# Altium PCB UI_BOARD.PcbDoc
Units mm, origin at the board's own origin, x right, y up, seen from the top; angles counter-clockwise.
Board outline 149.86 x 79.88 mm, 4 copper layers (SIG, GND_1, GND_2, PWR), stack 0.603 mm thick; 205 components, 146 nets, 820 pads, 0 vias.
Unrouted connection lines stored in the file: 595.
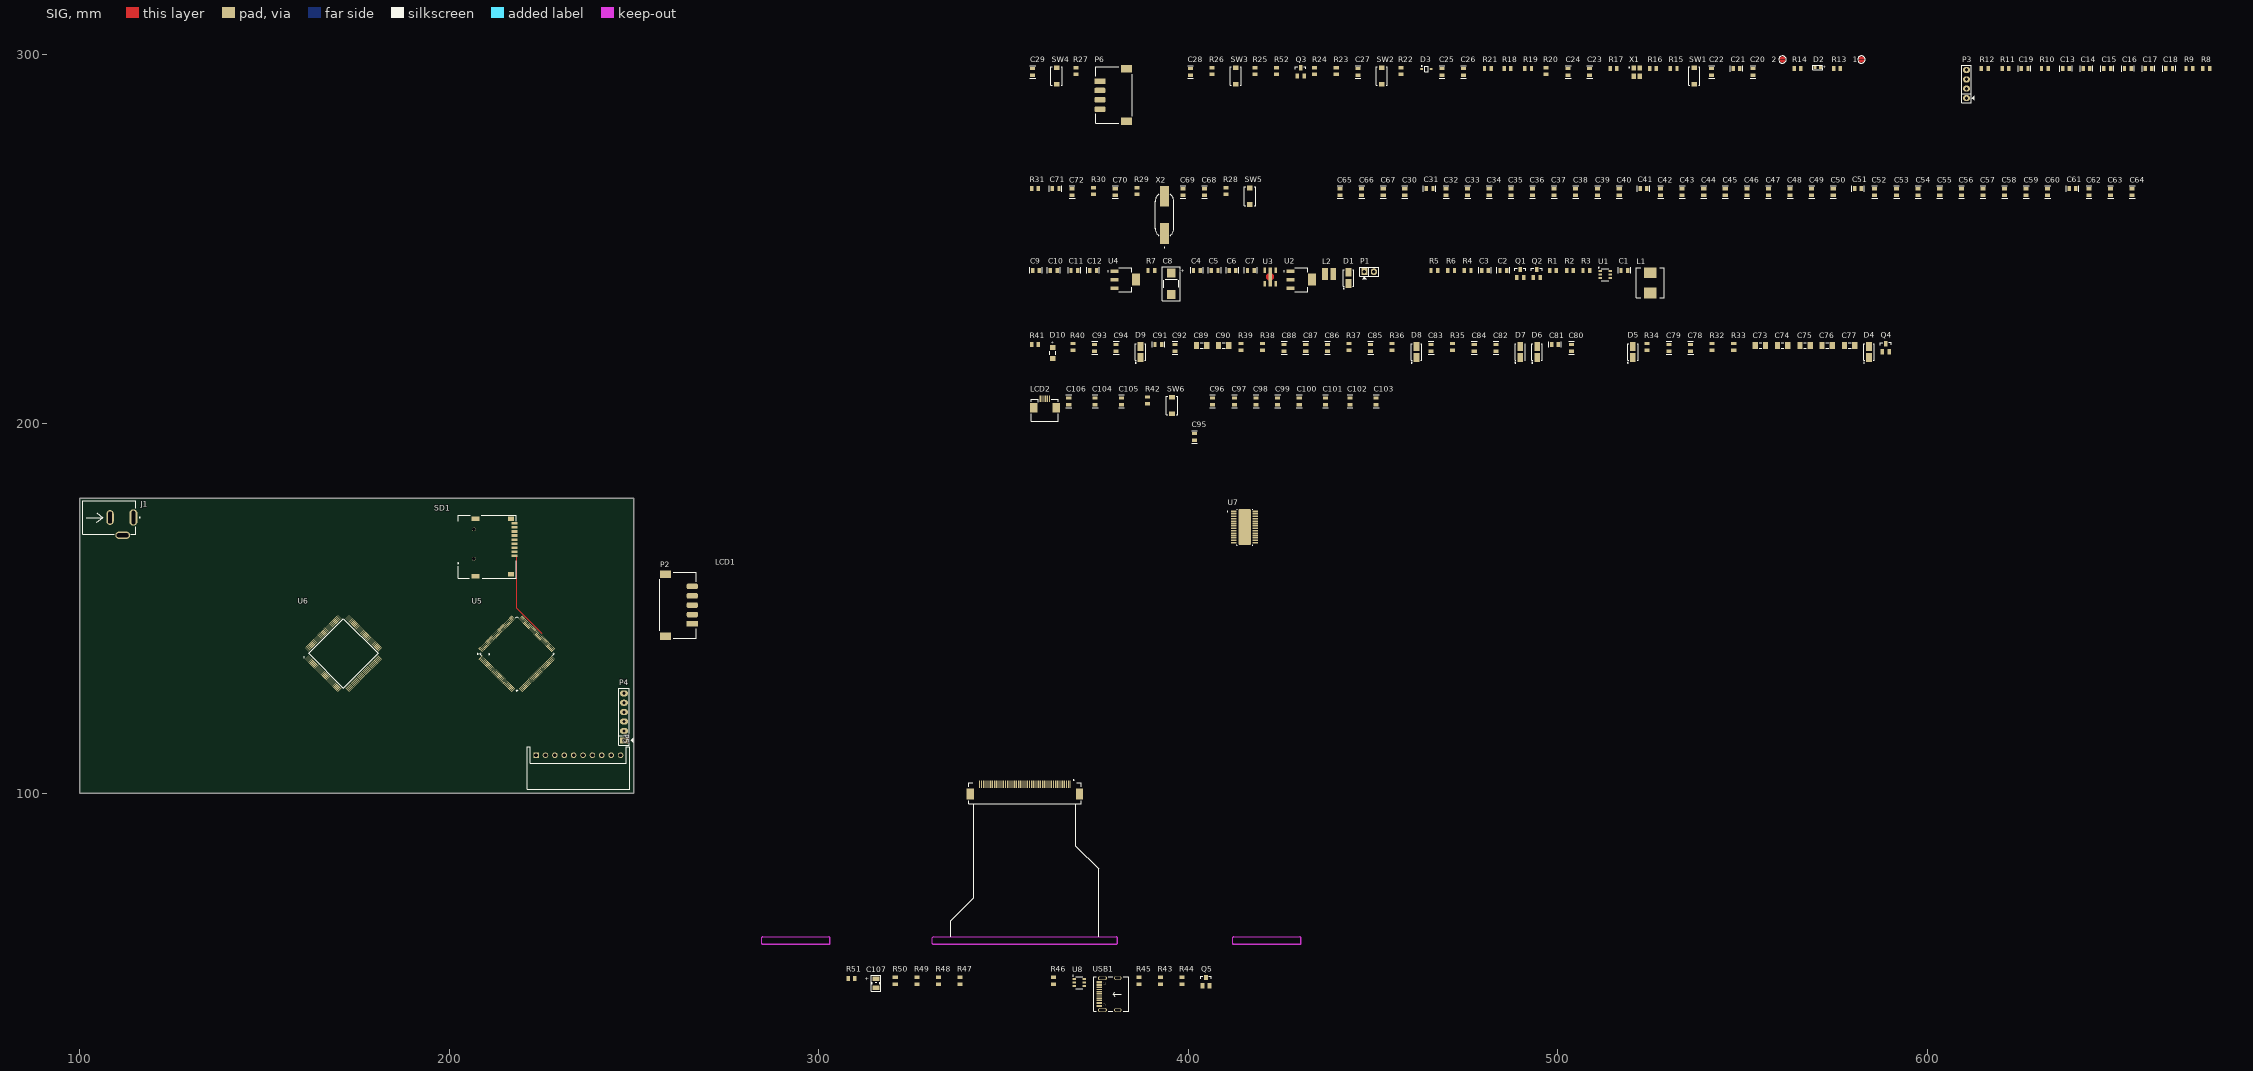
[diagram p0: SIG view]
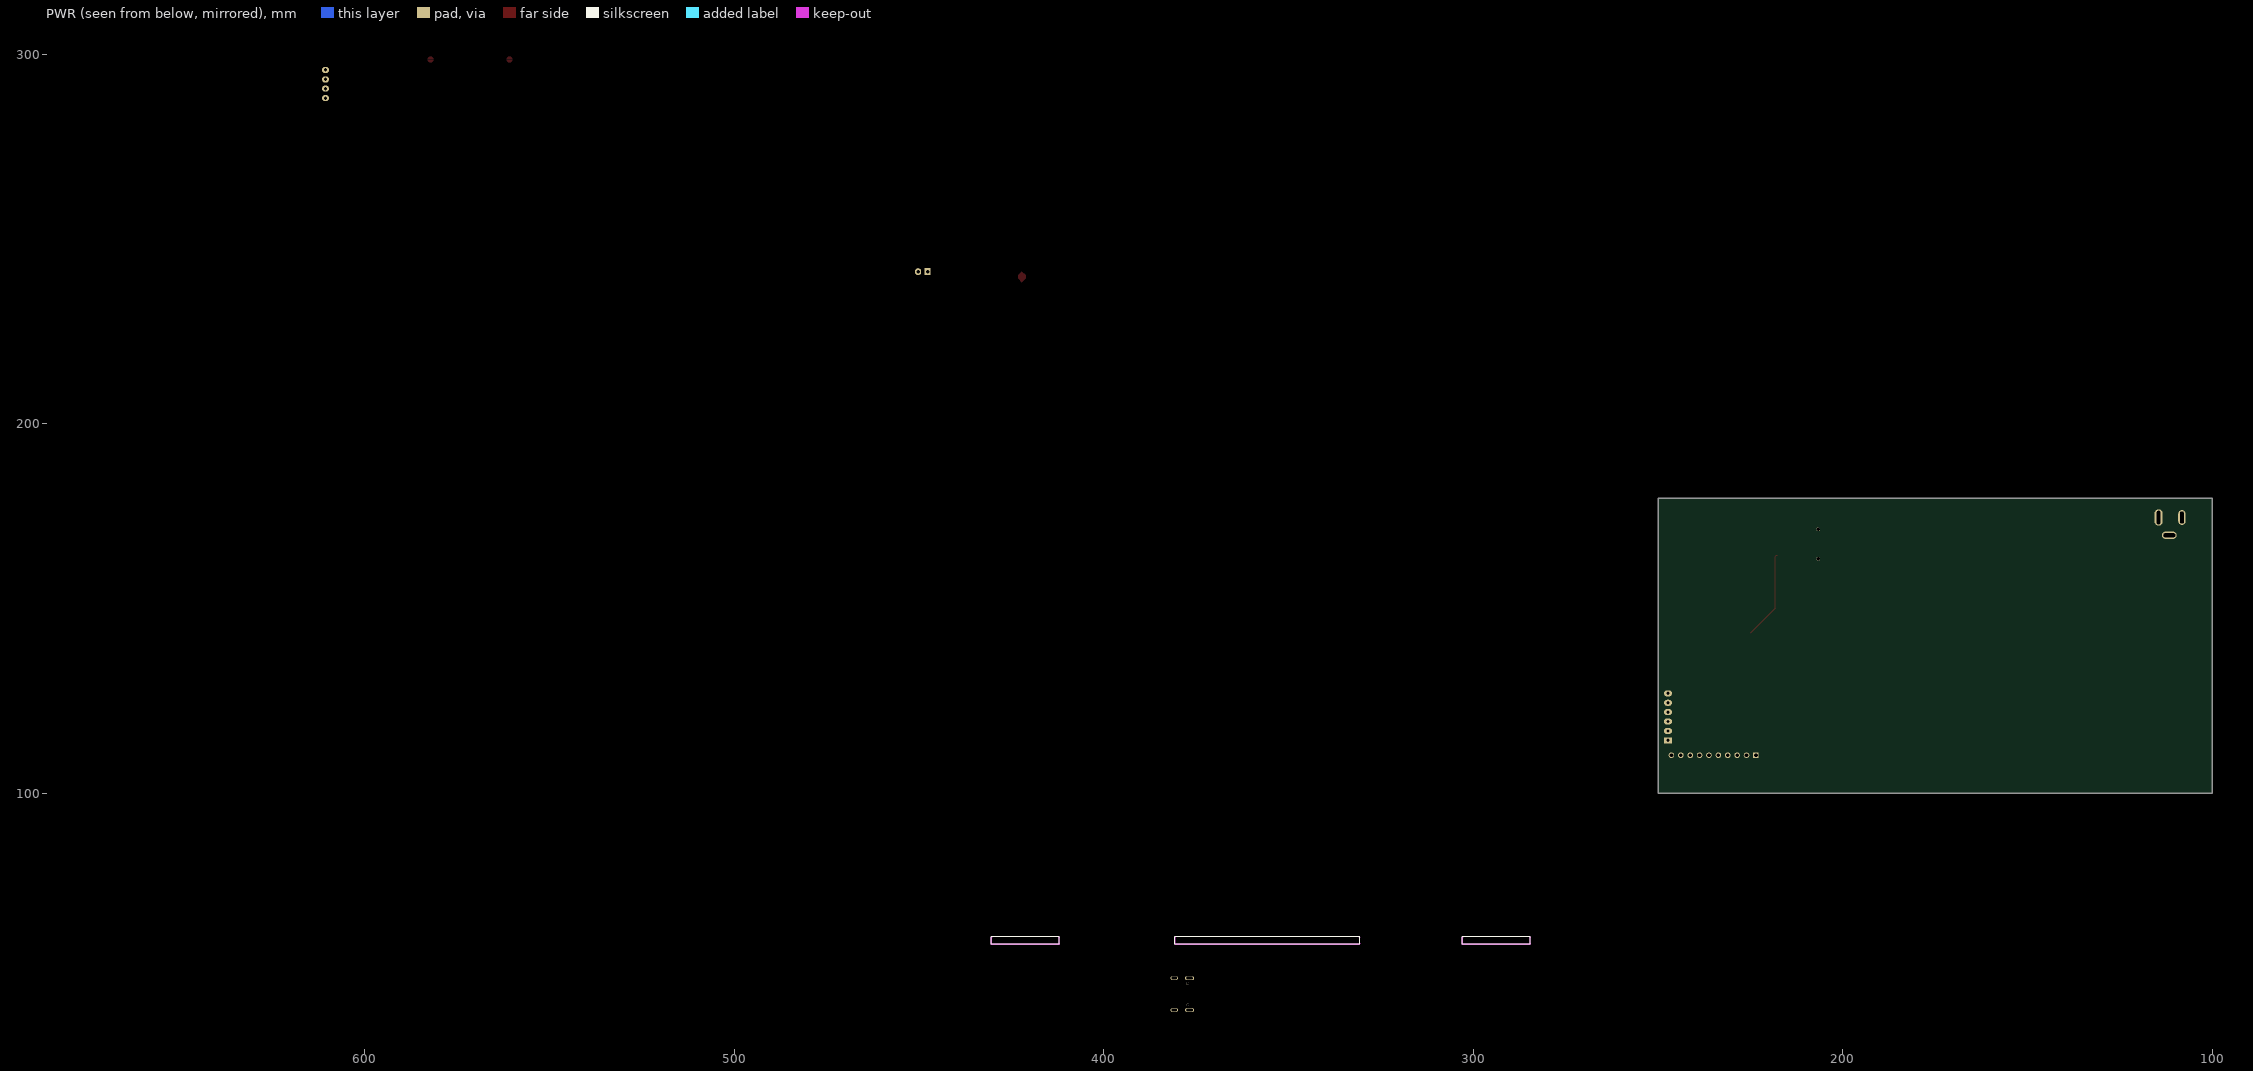
[diagram p1: PWR view, seen from below]
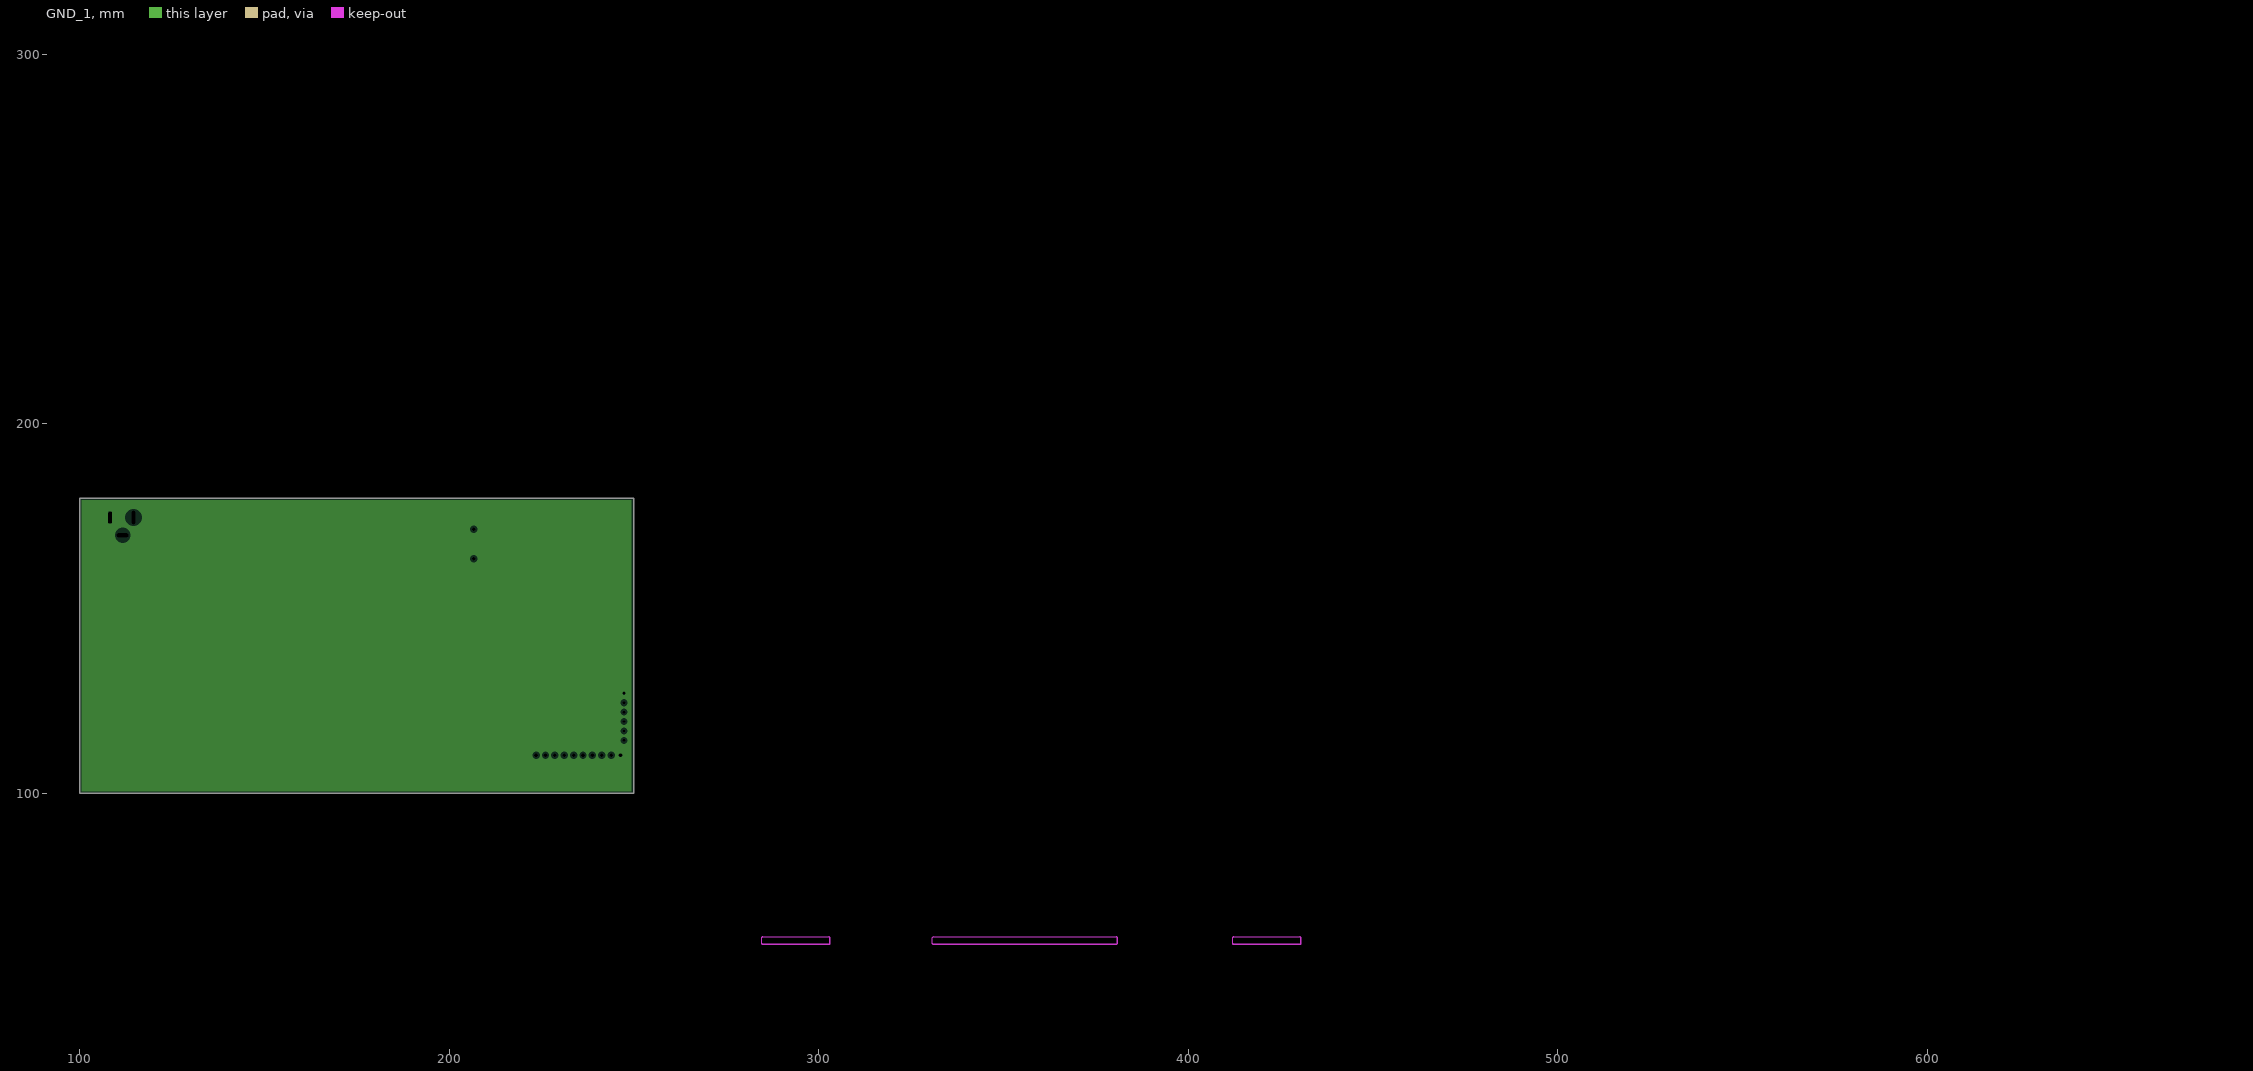
[diagram p2: GND_1, clearances drawn from the general rule]
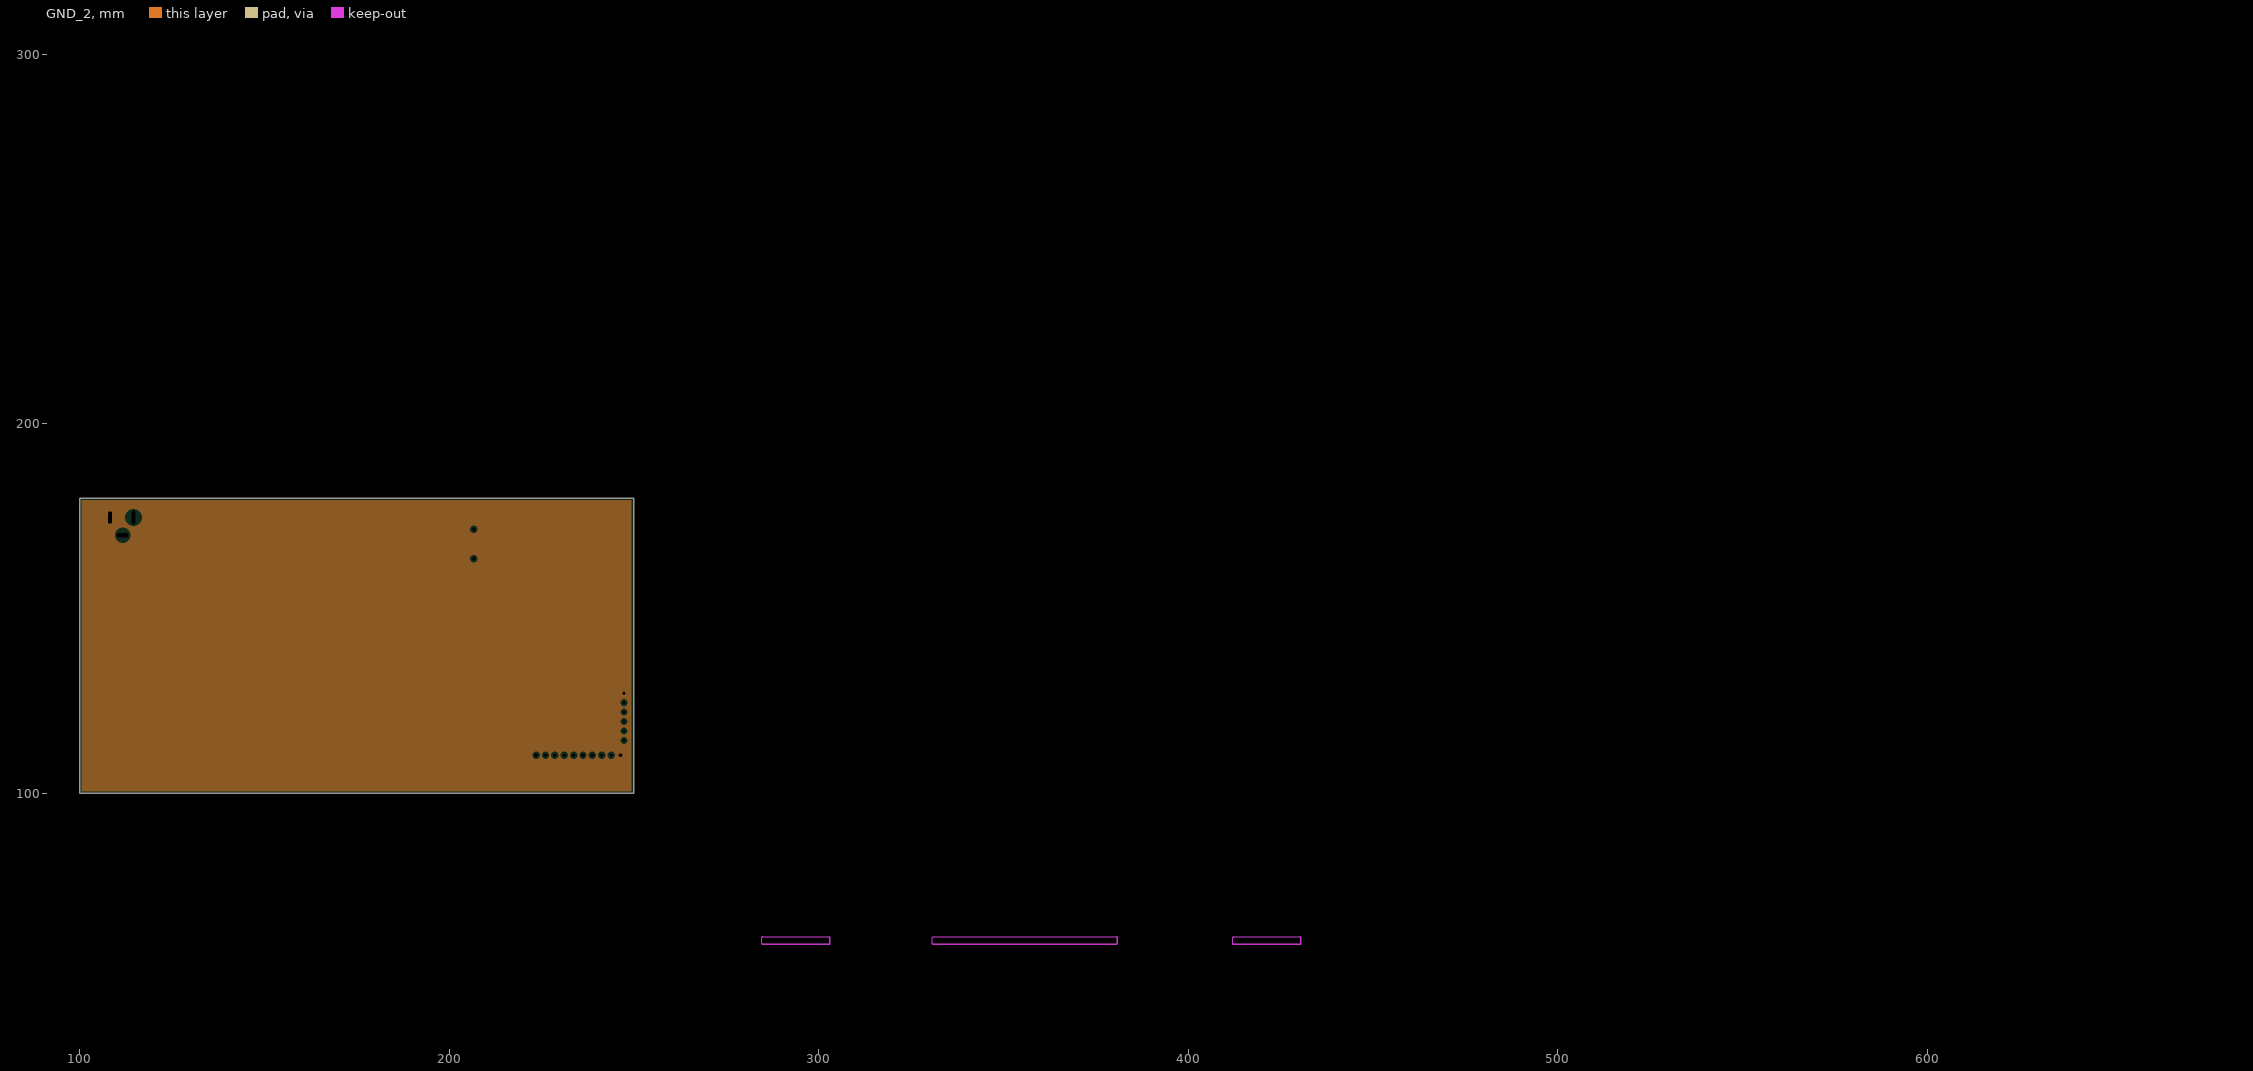
[diagram p3: GND_2, clearances drawn from the general rule]

## Layer stack, top to bottom
Top Solder: solder mask 0.0102, Solder Resist, Dk 3.5
SIG: signal copper 0.0356
Dielectric 2: prepreg 0.0711, PP-006, Dk 4.1
GND_1: plane copper 0.035, net GND
Dielectric 1: dielectric 0.32, FR-4, Dk 4.8
GND_2: plane copper 0.035, net GND
Dielectric 3: prepreg 0.0711, PP-006, Dk 4.1
PWR: signal copper 0.0356
Bottom Solder: solder mask 0.0102, Solder Resist, Dk 3.5

## Board outline
100,100 100,179.883 249.86,179.883 249.86,100

## Design rules (kind name [scope] priority, off if disabled: settings)
Clearance [All] p1: gap=0.254 ignorepadtopadclearanceinfootprint=FALSE except(0: Arc-Hole Track-Hole SMDPad-Hole THPad-Hole Via-Hole Fill-Hole Poly-Hole Region-Hole Text-Hole; 0.15: SMDPad-SMDPad; 0.2: Arc-Arc Arc-Track Arc-SMDPad Track-Track Track-SMDPad)
DiffPairsRouting [All] p1: maxlimit=0.254 minlimit=0.254 mostfreqgap=0.254 toplayer_minwidth=0.381 toplayer_maxwidth=0.381 toplayer_prefwidth=0.381 bottomlayer_minwidth=0.381 bottomlayer_maxwidth=0.381 bottomlayer_prefwidth=0.381 maxuncoupledlength=12.7
PlaneClearance [All] p1: clearance=0.508
PlaneConnect [All] p1: planeconnectstyle=Direct reliefexpansion=0.508 reliefentries=4 reliefconductorwidth=0.254 reliefairgap=0.254
PolygonConnect [All] p1: connectstyle=Relief reliefconductorwidth=0.254 reliefentries=4 polygonreliefangle="90 Angle" airgapwidth=0.254
RoutingVias [All] p1: holewidth=0.711 width=1.27 viastyle="Through Hole" minholewidth=0.711 minwidth=1.27 maxholewidth=0.711 maxwidth=1.27
SolderMaskExpansion [All] p1: expansion=0.102 istentingtop=FALSE
Width [All] p1: maxlimit=0.254 minlimit=0.254 preferedwidth=0.254
27 further rules are at their usual default settings.

## Classes and differential pairs
component class UI_MAIN: 1 2 C13 C14 C15 C16 C17 C18 C19 C20 C21 C22 C23 C24 C25 C26 C27 C28 C29 D2 D3 P2 P3 P4 P5 P6 Q3 R8 R9 R10 R11 R12 R13 R14 R15 R16 R17 R18 R19 R20 R21 R22 R23 R24 R25 R26 R27 R52 SW1 SW2 SW3 SW4 U5 X1
component class SSD_PINOUT: C30 C31 C32 C33 C34 C35 C36 C37 C38 C39 C40 C41 C42 C43 C44 C45 C46 C47 C48 C49 C50 C51 C52 C53 C54 C55 C56 C57 C58 C59 C60 C61 C62 C63 C64 C65 C66 C67 C68 C69 C70 C71 C72 R28 R29 R30 R31 SW5 U6 X2
component class POWER: C1 C2 C3 C4 C5 C6 C7 C8 C9 C10 C11 C12 D1 J1 L1 L2 P1 Q1 Q2 R1 R2 R3 R4 R5 R6 R7 U1 U2 U3 U4
component class LCD: C95 C96 C97 C98 C99 C100 C101 C102 C103 C104 C105 C106 LCD1 LCD2 R42 SW6
component class LCD_PWR: C73 C74 C75 C76 C77 C78 C79 C80 C81 C82 C83 C84 C85 C86 C87 C88 C89 C90 C91 C92 C93 C94 D4 D5 D6 D7 D8 D9 D10 L3 L4 Q4 R32 R33 R34 R35 R36 R37 R38 R39 R40 R41 U7
component class CONNS: C107 Q5 R43 R44 R45 R46 R47 R48 R49 R50 R51 SD1 U8 USB1
differential pair USB: +USB_P -USB_N

## Components (designator, comment, footprint, x,y, rotation, side; value= is the part's Value field where it differs from the comment)
1 "JMPR" JMPR 582.143,298.552 r90 top
2 "JMPR" JMPR 560.807,298.552 r90 top
C1 "22uF, 50V" C_0805 518.008,241.529 r0 top
C2 "22uF, 50V" C_0805 485.242,241.529 r0 top
C3 "22uF, 50V" C_0805 480.289,241.529 r0 top
C4 "0.1uF, 50V" C_0805 402.311,241.529 r0 top
C5 "10uF, 50V" C_0805 407.137,241.529 r0 top
C6 "0.1uF, 50V" C_0805 411.963,241.529 r0 top
C7 "10uF, 50V" C_0805 416.916,241.529 r0 top
C8 "100uF, 16V" C_2917+ 395.326,237.973 r0 top
C9 "0.1uF, 50V" C_0805 358.75,241.529 r0 top
C10 "10uF, 50V" C_0805 363.576,241.529 r0 top
C11 "0.1uF, 50V" C_0805 369.164,241.529 r0 top
C12 "22uF, 50V" C_0805 374.244,241.529 r0 top
C13 "100nF, 50V" C_0805 637.515,296.139 r0 top
C14 "100nF, 50V" C_0805 643.103,296.139 r0 top
C15 "100nF, 50V" C_0805 648.691,296.139 r0 top
C16 "100nF, 50V" C_0805 654.279,296.139 r0 top
C17 "100nF, 50V" C_0805 659.867,296.139 r0 top
C18 "100nF, 50V" C_0805 665.455,296.139 r0 top
C19 "10uF, 50V" C_0805 626.339,296.139 r0 top
C20 "10uF, 50V" C_0805 552.806,295.25 r90 top
C21 "10uF, 50V" C_0805 548.361,296.139 r0 top
C22 "8pF, 50V" C_0805 541.63,295.25 r90 top
C23 "100nF, 16V" C_0805 508.61,295.25 r90 top
C24 "8pF, 50V" C_0805 502.768,295.25 r90 top
C25 "10uF, 50V" C_0805 468.605,295.25 r90 top
C26 "0.1uF, 50V" C_0805 474.447,295.25 r90 top
C27 "0.1uF, 50V" C_0805 445.872,295.25 r90 top
C28 "100nF, 50V" C_0805 400.533,295.25 r90 top
C29 "100nF, 50V" C_0805 357.861,295.25 r90 top
C30 "100nF, 50V" C_0805 458.572,262.738 r90 top
C31 "100nF, 50V" C_0805 465.303,263.627 r0 top
C32 "100nF, 50V" C_0805 469.748,262.738 r90 top
C33 "100nF, 50V" C_0805 475.59,262.738 r90 top
C34 "100nF, 50V" C_0805 481.432,262.738 r90 top
C35 "100nF, 50V" C_0805 487.274,262.738 r90 top
C36 "100nF, 50V" C_0805 493.116,262.738 r90 top
C37 "100nF, 50V" C_0805 498.958,262.738 r90 top
C38 "100nF, 50V" C_0805 504.8,262.738 r90 top
C39 "100nF, 50V" C_0805 510.769,262.738 r90 top
C40 "100nF, 50V" C_0805 516.611,262.738 r90 top
C41 "100nF, 50V" C_0805 523.215,263.627 r0 top
C42 "100nF, 50V" C_0805 527.787,262.738 r90 top
C43 "100nF, 50V" C_0805 533.629,262.738 r90 top
C44 "100nF, 50V" C_0805 539.471,262.738 r90 top
C45 "100nF, 50V" C_0805 545.313,262.738 r90 top
C46 "100nF, 50V" C_0805 551.155,262.738 r90 top
C47 "100nF, 50V" C_0805 556.997,262.738 r90 top
C48 "100nF, 50V" C_0805 562.839,262.738 r90 top
C49 "100nF, 50V" C_0805 568.681,262.738 r90 top
C50 "100nF, 50V" C_0805 574.523,262.738 r90 top
C51 "100nF, 50V" C_0805 581.254,263.627 r0 top
C52 "100nF, 50V" C_0805 585.699,262.738 r90 top
C53 "100nF, 50V" C_0805 591.668,262.738 r90 top
C54 "100nF, 50V" C_0805 597.51,262.738 r90 top
C55 "100nF, 50V" C_0805 603.352,262.738 r90 top
C56 "100nF, 50V" C_0805 609.194,262.738 r90 top
C57 "100nF, 50V" C_0805 615.036,262.738 r90 top
C58 "100nF, 50V" C_0805 620.878,262.738 r90 top
C59 "100nF, 50V" C_0805 626.72,262.738 r90 top
C60 "100nF, 50V" C_0805 632.562,262.738 r90 top
C61 "100nF, 50V" C_0805 639.293,263.627 r0 top
C62 "100nF, 50V" C_0805 643.738,262.738 r90 top
C63 "100nF, 50V" C_0805 649.58,262.738 r90 top
C64 "100nF, 50V" C_0805 655.422,262.738 r90 top
C65 "10uF, 50V" C_0805 441.046,262.738 r90 top
C66 "10uF, 50V" C_0805 446.888,262.738 r90 top
C67 "10uF, 50V" C_0805 452.73,262.738 r90 top
C68 "100nF, 50V" C_0805 404.343,262.738 r90 top
C69 "22pF, 50V" C_0805 398.501,262.738 r90 top
C70 "22pF, 50V" C_0805 380.213,262.738 r90 top
C71 "10uF, 50V" C_0805 364.084,263.627 r0 top
C72 "0.1uF, 50V" C_0805 368.529,262.738 r90 top
C73 "22uF, 25V" C_1206 554.838,221.209 r0 top
C74 "22uF, 25V" C_1206 560.807,221.209 r0 top
C75 "22uF, 25V" C_1206 566.903,221.209 r0 top
C76 "22uF, 25V" C_1206 572.872,221.209 r0 top
C77 "22uF, 25V" C_1206 578.968,221.209 r0 top
C78 "22pF, 50V" C_0805 535.915,220.574 r90 top
C79 "1uF, 50V" C_0805 530.073,220.574 r90 top
C80 "1uF, 50V" C_0805 503.657,220.574 r90 top
C81 "0.47uF, 50V" C_0805 499.212,221.463 r0 top
C82 "0.47uF, 50V" C_0805 483.21,220.574 r90 top
C83 "0.47uF, 50V" C_0805 465.684,220.574 r90 top
C84 "0.47uF, 50V" C_0805 477.368,220.574 r90 top
C85 "0.47uF, 50V" C_0805 449.301,220.574 r90 top
C86 "100nF, 50V" C_0805 437.617,220.574 r90 top
C87 "100nF, 50V" C_0805 431.775,220.574 r90 top
C88 "22nF, 50V" C_0805 425.933,220.574 r90 top
C89 "22uF, 25V" C_1206 403.581,221.209 r0 top
C90 "22uF, 25V" C_1206 409.55,221.209 r0 top
C91 "220nF, 50V" C_0805 391.897,221.463 r0 top
C92 "22nF, 50V" C_0805 396.342,220.574 r90 top
C93 "22nF, 50V" C_0805 374.625,220.574 r90 top
C94 "10nF, 50V" C_0805 380.467,220.574 r90 top
C95 "10uF, 50V" C_0805 401.65,196.469 r90 top
C96 "1uF, 50V" C_0805 406.502,206.096 r90 top
C97 "1uF, 50V" C_0805 412.471,206.096 r90 top
C98 "10uF, 50V" C_0805 418.313,206.096 r90 top
C99 "0.1uF, 50V" C_0805 424.155,206.096 r90 top
C100 "0.1uF, 50V" C_0805 429.997,206.096 r90 top
C101 "10uF, 50V" C_0805 437.109,206.096 r90 top
C102 "0.1uF, 50V" C_0805 443.713,206.096 r90 top
C103 "10uF, 50V" C_0805 450.825,206.096 r90 top
C104 "10uF, 50V" C_0805 374.752,206.096 r90 top
C105 "0.1uF, 50V" C_0805 381.864,206.096 r90 top
C106 "100nF, 50V" C_0805 367.64,206.096 r90 top
C107 "0,1uF, 50V" C_1206+ 315.468,48.514 r0 top
D1 "3A, 500mV" "PKG_SMA (DO-214AC)" 443.332,239.497 r90 top
D2 "Green,  1.8 V" LED_0603 570.332,296.393 r0 top
D3 "1,25V, 150mA" PKG_SOD-323 464.414,296.012 r0 top
D4 "3A, 500mV" "PKG_SMA (DO-214AC)" 584.175,219.431 r90 top
D5 "3A, 500mV" "PKG_SMA (DO-214AC)" 520.294,219.431 r90 top
D6 "3A, 500mV" "PKG_SMA (DO-214AC)" 494.386,219.431 r90 top
D7 "3A, 500mV" "PKG_SMA (DO-214AC)" 489.814,219.431 r90 top
D8 "3A, 500mV" "PKG_SMA (DO-214AC)" 461.747,219.431 r90 top
D9 "3A, 500mV" "PKG_SMA (DO-214AC)" 387.071,219.431 r90 top
D10 "Red, 2.6 V" LED_1206 363.322,219.177 r90 top
J1 "DC5521" CONN_DC5521 107.929,174.625 r270 top
L1 "10uH, 3A" COIL_74 524.993,237.973 r0 top
L2 "68uH, 510mA" COIL_CD32 438.125,240.513 r0 top
LCD1 "LCD_AT070TN92" CONN_LCD_AT070TN90 356.16,82.127 r0 top
LCD2 "GT911" "GT911 TS FPC" 361.163,203.683 r0 top
P1 "Header 2" JP2 447.65,241.148 r0 top
P2 "Header5" CONN_Header5 261.245,150.901 r90 top
P3 "Header 4" JP4 610.591,290.678 r90 top
P4 "Header 6" JP6 247.269,114.325 r90 top
P5 "Header10" CONN_Header10 234.721,104.597 r0 top
P6 "Header4" CONN_Header4 379.959,288.9 r0 top
Q1 "AO3401" PKG_SOT-23 489.814,240.64 r0 top
Q2 "AO3401" PKG_SOT-23 494.259,240.64 r0 top
Q3 "AO3401" PKG_SOT-23 430.378,295.25 r0 top
Q4 "AO3401" PKG_SOT-23 588.747,220.574 r0 top
Q5 "AO3401" PKG_SOT-23 404.749,49.022 r0 top
R1 "10Kohm, 1/16W" R_0805 498.704,241.529 r0 top
R2 "10Kohm, 1/16W" R_0805 503.276,241.529 r0 top
R3 "11Kohm, 1/16W" R_0805 507.721,241.529 r0 top
R4 "1.5Kohm, 1/16W" R_0805 475.59,241.529 r0 top
R5 "10Kohm, 1/16W" R_0805 466.573,241.529 r0 top
R6 "10Kohm, 1/16W" R_0805 471.145,241.529 r0 top
R7 "560ohm, 1/16W" R_0805 389.992,241.529 r0 top
R8 "10Kohm, 1/16W" R_0805 675.488,296.139 r0 top
R9 "10Kohm, 1/16W" R_0805 670.916,296.139 r0 top
R10 "10Kohm, 1/16W" R_0805 631.8,296.139 r0 top
R11 "10Kohm, 1/16W" R_0805 621.132,296.139 r0 top
R12 "10Kohm, 1/16W" R_0805 615.544,296.139 r0 top
R13 "220ohm, 1/16W" R_0805 575.539,296.139 r0 top
R14 "10Kohm, 1/16W" R_0805 564.871,296.139 r0 top
R15 "10Kohm, 1/16W" R_0805 531.343,296.139 r0 top
R16 "1Mohm, 1/16W" R_0805 525.755,296.139 r0 top
R17 "10Kohm, 1/16W" R_0805 515.087,296.139 r0 top
R18 "220ohm, 1/16W" R_0805 486.385,296.139 r0 top
R19 "1ohm, 1/16W" R_0805 491.973,296.139 r0 top
R20 "0ohm" R_0805 496.799,295.504 r90 top
R21 "10Kohm, 1/16W" R_0805 481.051,296.139 r0 top
R22 "0ohm" R_0805 457.556,295.504 r90 top
R23 "100kohm, 1/16W" R_0805 440.03,295.504 r90 top
R24 "1ohm, 1/16W" R_0805 434.188,295.504 r90 top
R25 "10Kohm, 1/16W" R_0805 418.059,295.504 r90 top
R26 "10Kohm, 1/16W" R_0805 406.375,295.504 r90 top
R27 "10Kohm, 1/16W" R_0805 369.545,295.504 r90 top
R28 "10Kohm, 1/16W" R_0805 410.185,262.992 r90 top
R29 "1Mohm, 1/16W" R_0805 386.055,262.992 r90 top
R30 "1ohm, 1/16W" R_0805 374.371,262.992 r90 top
R31 "1ohm, 1/16W" R_0805 358.496,263.627 r0 top
R32 "47Kohm, 1/16W" R_0805 541.757,220.828 r90 top
R33 "10Kohm, 1/16W" R_0805 547.599,220.828 r90 top
R34 "6.2Kohm, 1/16W" R_0805 524.104,220.828 r90 top
R35 "100Kohm, 1/16W" R_0805 471.526,220.828 r90 top
R36 "75Kohm, 1/16W" R_0805 455.143,220.828 r90 top
R37 "8.2Kohm, 1/16W" R_0805 443.459,220.828 r90 top
R38 "13Kohm, 1/16W" R_0805 420.091,220.828 r90 top
R39 "2Kohm, 1/16W" R_0805 414.249,220.828 r90 top
R40 "1.2Kohm, 1/16W" R_0805 368.783,220.828 r90 top
R41 "220ohm, 1/16W" R_0805 358.496,221.463 r0 top
R42 "10Kohm, 1/16W" R_0805 388.976,206.35 r90 top
R43 "10Kohm, 1/16W" R_0805 392.43,49.276 r90 top
R44 "10Kohm, 1/16W" R_0805 398.272,49.276 r90 top
R45 "5.1Kohm, 1/16W" R_0805 386.588,49.276 r90 top
R46 "5.1Kohm, 1/16W" R_0805 363.474,49.276 r90 top
R47 "10Kohm, 1/16W" R_0805 338.201,49.276 r90 top
R48 "10Kohm, 1/16W" R_0805 332.359,49.276 r90 top
R49 "10Kohm, 1/16W" R_0805 326.517,49.276 r90 top
R50 "10Kohm, 1/16W" R_0805 320.675,49.276 r90 top
R51 "10Kohm, 1/16W" R_0805 308.864,49.911 r0 top
R52 "10Kohm, 1/16W" R_0805 423.901,295.504 r90 top
SD1 "SD_HOLDER" CONN_SD_Holder 210.793,166.799 r90 top
SW1 "SWSMD" SW_SMD_NOGND 536.931,294.107 r90 top
SW2 "SWSMD" SW_SMD_NOGND 452.349,294.107 r90 top
SW3 "SWSMD" SW_SMD_NOGND 412.852,294.107 r90 top
SW4 "SWSMD" SW_SMD_NOGND 364.338,294.107 r90 top
SW5 "SWSMD" SW_SMD_NOGND 416.662,261.595 r90 top
SW6 "SWSMD" SW_SMD_NOGND 395.58,204.953 r90 top
U1 "MT2492" PKG-SOT23-6 512.801,240.386 r0 top
U2 "LM1117-3.3V" PKG_SOT-223 430.505,238.989 r0 top
U3 "PT4115" PKG_SOT-89-5 422.123,239.751 r0 top
U4 "AMS1117-1.2V" PKG_SOT-223 382.88,238.989 r0 top
U5 "STMF407VET6" PKG_LQFP-100 218.389,137.338 r45 top
U6 "SSD1963QL9" PKG_LQFP-128 171.323,137.846 r45 top
U7 "TPS65161" PKG_HTSSOP-28 415.239,172.034 r0 top
U8 "SRV05-4HTG" PKG-SOT23-6 370.459,48.768 r0 top
USB1 "USB4105-GF-A" CONN_USB-C 379.603,45.593 r0 top
X1 "25MHz" PKG_TSX-3225 521.31,295.123 r0 top
X2 "10MHz" PKG_HC49-S 393.548,256.515 r90 top

## Footprints (in the part's own frame and the unit in brackets; to place one, negate y for a bottom-side part, rotate by r counter-clockwise, add the part's x,y. Pads: shape width x height; smd on the part's side, far side on the other; paste and mask are expansions set on the pad)
C_0805 [mil]
  rect 35.98x54.41 smd: 1(-36,0) 2(35,0)
  silkscreen extent -68,-32 67,30, body extent -41,-27 41,27, height 24
C_1206 [mm]
  rect 1.4x1.85 smd: 1(-1.397,0) 2(1.397,0)
  silkscreen extent -0.38,-0.76 0.38,0.76, body extent -1.72,-0.92 1.73,0.92, height 1.6
C_1206+ [mm]
  rect 1.8x1.23 smd: 1(0,1.3) 2(0,-1.1)
  silkscreen extent -1.27,-2.06 1.27,2.27, body extent -0.8,-1.5 0.8,1.7, height 1.61
C_2917+ [mm]
  rect 2.27x2.43 smd: 1(0,2.839) 2(0,-3.003)
  silkscreen extent -2.41,-4.65 2.41,4.49, body extent -2.15,-3.73 2.15,3.57, height 1.81
COIL_74 [mm]
  rect 3.5x2.95 smd: 1(0.004,2.905) 2(0.004,-2.545)
  silkscreen extent -3.8,-3.92 3.8,4.28, body extent -3.3,-3.42 3.3,3.78, height 5.01
COIL_CD32 [mm] "Precision Wire Wound Inductor, 2-Leads, Body 3,50x3,00mm, IPC Medium Density"
  rect 1.5x3.3 smd: 1(-1.143,0) 2(1.143,0)
  body extent -1.85,-1.6 1.85,1.6, height 2.3
CONN_DC5521 [mm]
  oval 4.4x2.2 hole 1 slot 3.6 at 0 deg: 1(0,6.55)
  oval 4x2 hole 1 slot 3.2 at 0 deg: 2(0,0.25)
  oval 2x4 hole 1 slot 3.2 at 90 deg: 3(4.8,3.65)
  silkscreen extent -4.5,-7.15 4.5,8.35, body extent -4.5,-7.15 5.05,7.15, height 11
CONN_Header4 [mm]
  rect 3x1.5 smd: 1(-3.9,3.846)
  rrect50% 3x1.5 smd: 2(-3.9,1.306) 3(-3.9,-1.234) 4(-3.9,-3.774)
  rect 3x2 smd: 5(3.339,-7.076) 5(3.339,7.148)
  silkscreen extent -5.04,-7.58 4.86,7.66, body extent -5.04,-7.57 4.86,7.64, height 5.92
CONN_Header5 [mm]
  rect 1.5x3 smd: 1(-5.08,-4.49)
  rrect50% 1.5x3 smd: 2(-2.54,-4.49) 3(0,-4.49) 4(2.54,-4.49) 5(5.08,-4.49)
  rect 2x3 smd: 6(-8.382,2.749) 6(8.382,2.749)
  silkscreen extent -8.89,-5.63 8.89,4.27, body extent -8.88,-5.63 8.88,4.27, height 5.92
CONN_Header10 [mm]
  rect 1.508x1.508 / inner round 1.508 / far side rect 1.508x1.508 hole 1: 1(-11.25,5.7)
  round 1.508 hole 1: 2(-8.71,5.7) 3(-6.17,5.7) 4(-3.63,5.7) 5(-1.09,5.7) 6(1.45,5.7) 7(3.99,5.7) 8(6.53,5.7) 9(9.07,5.7) 10(11.61,5.7)
  silkscreen extent -13.7,-3.5 14.05,8, body extent -13.51,-3.44 13.89,8.06, height 6.1
CONN_LCD_AT070TN90 [mm]
  rect 0.3x2 smd: 1(11.85,20.32) 2(11.35,20.32) 3(10.85,20.32) 4(10.35,20.32) 5(9.85,20.32) 6(9.35,20.32) 7(8.85,20.32) 8(8.35,20.32) 9(7.85,20.32) 10(7.35,20.32) 11(6.85,20.32) 12(6.35,20.32) 13(5.85,20.32) 14(5.35,20.32) 15(4.85,20.32) 16(4.35,20.32) 17(3.85,20.32) 18(3.35,20.32) 19(2.85,20.32) 20(2.35,20.32) 21(1.85,20.32) 22(1.35,20.32) 23(0.85,20.32) 24(0.35,20.32) 25(-0.15,20.32) 26(-0.65,20.32) 27(-1.15,20.32) 28(-1.65,20.32) 29(-2.15,20.32) 30(-2.65,20.32) 31(-3.15,20.32) 32(-3.65,20.32) 33(-4.15,20.32) 34(-4.65,20.32) 35(-5.15,20.32) 36(-5.65,20.32) 37(-6.15,20.32) 38(-6.65,20.32) 39(-7.15,20.32) 40(-7.65,20.32) 41(-8.15,20.32) 42(-8.65,20.32) 43(-9.15,20.32) 44(-9.65,20.32) 45(-10.15,20.32) 46(-10.65,20.32) 47(-11.15,20.32) 48(-11.65,20.32) 49(-12.15,20.32) 50(-12.65,20.32)
  rect 2x3 smd: 51(14.39,17.695) 52(-15.19,17.695)
  Keep-Out Layer board cut-out: 55.838,-22.746 55.838,-21.254 55.858,-21.157 55.913,-21.074 55.995,-21.019 56.092,-21 56.092,-21 74.012,-21 74.109,-21.019 74.192,-21.074 74.247,-21.157 74.266,-21.254 74.266,-21.254 74.266,-22.746 74.247,-22.843 74.192,-22.926 74.109,-22.981 74.012,-23 74.012,-23 56.092,-23 55.995,-22.981 55.913,-22.926 55.858,-22.843 55.838,-22.746
  Keep-Out Layer board cut-out: -71.613,-22.746 -71.613,-21.254 -71.593,-21.157 -71.538,-21.074 -71.456,-21.019 -71.359,-21 -71.359,-21 -53.439,-21 -53.342,-21.019 -53.259,-21.074 -53.204,-21.157 -53.185,-21.254 -53.185,-21.254 -53.185,-22.746 -53.204,-22.843 -53.259,-22.926 -53.342,-22.981 -53.439,-23 -53.439,-23 -71.359,-23 -71.456,-22.981 -71.538,-22.926 -71.593,-22.843 -71.613,-22.746
  Keep-Out Layer board cut-out: -25.42,-22.746 -25.42,-21.254 -25.401,-21.157 -25.346,-21.074 -25.263,-21.019 -25.166,-21 -25.166,-21 24.326,-21 24.423,-21.019 24.506,-21.074 24.561,-21.157 24.58,-21.254 24.58,-21.254 24.58,-22.746 24.561,-22.843 24.506,-22.926 24.423,-22.981 24.326,-23 24.326,-23 -25.166,-23 -25.263,-22.981 -25.346,-22.926 -25.401,-22.843 -25.42,-22.746
  Keep-Out Layer lines w0.254: -71.628,-22.746 ccw(c-71.374,-22.746) -71.374,-23 -53.454,-23 ccw(c-53.454,-22.746) -53.2,-22.746 -53.2,-21.254 ccw(c-53.454,-21.254) -53.454,-21 -71.374,-21 ccw(c-71.374,-21.254) -71.628,-21.254 -71.628,-22.746 ; -25.42,-22.746 ccw(c-25.166,-22.746) -25.166,-23 24.326,-23 ccw(c24.326,-22.746) 24.58,-22.746 24.58,-21.254 ccw(c24.326,-21.254) 24.326,-21 -25.166,-21 ccw(c-25.166,-21.254) -25.42,-21.254 -25.42,-22.746 ; 55.838,-22.746 ccw(c56.092,-22.746) 56.092,-23 74.012,-23 ccw(c74.012,-22.746) 74.266,-22.746 74.266,-21.254 ccw(c74.012,-21.254) 74.012,-21 56.092,-21 ccw(c56.092,-21.254) 55.838,-21.254 55.838,-22.746
  silkscreen extent -20.42,-21 19.58,21.52, body extent -84.4,-22.41 80.6,79, height 9.1
CONN_SD_Holder [mm]
  rect 0.7x1.6 smd: 1(-2.55,-6.836) 2(-1.45,-6.836) 3(-0.35,-6.836) 4(0.75,-6.836) 5(1.85,-6.836) 6(2.95,-6.836) 7(4.05,-6.836) 8(5.15,-6.836) 9(6.25,-6.836)
  round 1 hole 1: 4(-3.35,4.164) 4(4.63,4.164)
  rect 1.2x2.2 smd: 6(-8.05,3.764) 6(7.48,3.764)
  rect 1.2x1.6 smd: 6(-7.5,-5.836) 6(7.48,-5.836)
  silkscreen extent -8.65,-7.34 8.45,8.5, body extent -8.37,-7.03 7.77,15.13, height 1.95
CONN_USB-C [mm]
  rect 1.5x0.6 smd: A1(-3.773,-3.152) A4(-3.773,-2.352) B1(-3.773,3.248) B4(-3.773,2.448)
  rect 1.5x0.3 smd: A5(-3.773,-1.202) A6(-3.773,-0.202) A7(-3.773,0.298) A8(-3.773,-1.702) B5(-3.773,1.798) B6(-3.773,0.798) B7(-3.773,-0.702) B8(-3.773,1.298)
  oval 2.5x1 hole 0.7 slot 1.7 at 0 deg: SHIELD(-2.856,-4.272) SHIELD(-2.856,4.368)
  round 0.65 hole 0.65 mask+0.102: SHIELD(-2.356,-2.842) SHIELD(-2.356,2.938)
  oval 2x1 hole 0.7 slot 1.4 at 0 deg: SHIELD(1.294,-4.272) SHIELD(1.294,4.368)
  silkscreen extent -5.2,-4.63 4.23,4.74, body extent -4.02,-4.42 3.88,4.52, height 3.24
"GT911 TS FPC" [mm]
  rect 0.3x1.706 smd: 1(-1.25,3.096) 2(-0.75,3.096) 3(-0.25,3.096) 4(0.25,3.096) 5(0.75,3.096) 6(1.25,3.096)
  rect 2x2.562 smd: S1(-3.05,0.6) S2(3.05,0.6)
  silkscreen extent -3.65,-3 3.65,3, body extent -3.55,-2.92 3.55,3.58, height 2.23
JMPR [mil]
  round 1 smd paste-99999 mask+0: 1(-16.52,0) 2(18.14,0)
  SIG region: -4.32,-29.08 -16.82,-23.68 -25.58,-13.25 -28.72,0 -25.58,13.25 -16.82,23.68 -4.32,29.08 -4.32,29.08
  SIG region: 5.94,29.08 18.44,23.68 27.2,13.25 30.34,0 27.2,-13.25 18.44,-23.68 5.94,-29.08 5.94,-29.08
  silkscreen extent -39,-39 40,39
JP2 [mil]
  rect 65x75 hole 36: 1(0,0)
  oval 65x75 hole 36: 2(101,0)
  silkscreen extent -50,-81 150,50, body extent -48,-50 148,48, height 323
JP4 [mil] "Jumper 4"
  oval 65x75 hole 36: 1(-100,0) 2(1,0) 3(99,0) 4(200,0)
  silkscreen extent -150,-81 250,50, body extent -148,-48 248,50, height 323
JP6 [mil] "JP6"
  rect 65x85 hole 36: 1(0,0)
  oval 65x85 hole 36: 2(100,0) 3(200,0) 4(300,0) 5(400,0) 6(500,0)
  silkscreen extent -50,-99 556,58, body extent -48,-50 548,48, height 323
LED_0603 [mm] "SMD Mono-color Chip LED, body 1.6x0.8mm"
  rect 0.8x0.8 smd: 1(-0.8,0) 2(0.8,0)
  silkscreen extent -1.4,-0.58 1.4,0.58, body extent -0.8,-0.4 0.8,0.4, height 0.25
LED_1206 [mm] "SMD Mono-color Chip LED, body 3.2x1.6mm"
  rect 1.4x1.5 smd: 1(-1.5,0) 2(1.5,0)
  silkscreen extent -0.5,-0.85 0.5,0.85, body extent -1.6,-0.8 1.6,0.8, height 0.68
PKG-SOT23-6 [mil]
  rect 38.5x22 smd paste+0 mask+0: 1(-53.75,37.4) 2(-53.75,0) 3(-53.75,-37.4) 4(53.75,-37.4) 5(53.75,0) 6(53.75,37.4)
  silkscreen extent -71,-64 40,77, body extent -65,-59 53,59, height 57
PKG_HC49-S [mm]
  rect 5.612x2.332 smd paste+0 mask+0: 1(-5.038,0) 2(5.038,0)
  silkscreen extent -8.89,-2.53 5.63,2.53, body extent -7.54,-2.4 7.54,2.4, height 3.25
PKG_HTSSOP-28 [mm]
  rrect20% 1.5x0.45 smd mask+0: 1(-2.9,4.225) 2(-2.9,3.575) 3(-2.9,2.925) 4(-2.9,2.275) 5(-2.9,1.625) 6(-2.9,0.975) 7(-2.9,0.325) 8(-2.9,-0.325) 9(-2.9,-0.975) 10(-2.9,-1.625) 11(-2.9,-2.275) 12(-2.9,-2.925) 13(-2.9,-3.575) 14(-2.9,-4.225) 15(2.9,-4.225) 16(2.9,-3.575) 17(2.9,-2.925) 18(2.9,-2.275) 19(2.9,-1.625) 20(2.9,-0.975) 21(2.9,-0.325) 22(2.9,0.325) 23(2.9,0.975) 24(2.9,1.625) 25(2.9,2.275) 26(2.9,2.925) 27(2.9,3.575) 28(2.9,4.225)
  rrect20% 3.405x9.717 smd mask+0: 23(0,0)
  silkscreen extent -4.75,-4.85 2.2,4.85, body extent -3.2,-4.85 3.2,4.85, height 1.2
PKG_LQFP-100 [mm]
  rect 1.4x0.22 smd paste+0 mask+0: 1(-7.477,6.542)
  rrect50% 1.4x0.22 smd paste+0 mask+0: 2(-7.477,6.142) 3(-7.477,5.742) 4(-7.477,5.342) 5(-7.477,4.942) 6(-7.477,4.542) 7(-7.477,4.142) 8(-7.477,3.742) 9(-7.477,3.342) 10(-7.477,2.942) 11(-7.477,2.542) 12(-7.477,2.142) 13(-7.477,1.742) 14(-7.477,1.342) 15(-7.477,0.942) 16(-7.477,0.542) 17(-7.477,0.142) 18(-7.477,-0.258) 19(-7.477,-0.658) 20(-7.477,-1.058) 21(-7.477,-1.458) 22(-7.477,-1.858) 23(-7.477,-2.258) 24(-7.477,-2.658) 25(-7.477,-3.058) 26(-7.477,-3.458) 27(-7.477,-3.858) 28(-7.477,-4.258) 29(-7.477,-4.658) 30(-7.477,-5.058) 31(-7.477,-5.458) 32(-7.477,-5.858) 65(7.877,-5.858) 66(7.877,-5.458) 67(7.877,-5.058) 68(7.877,-4.658) 69(7.877,-4.258) 70(7.877,-3.858) 71(7.877,-3.458) 72(7.877,-3.058) 73(7.877,-2.658) 74(7.877,-2.258) 75(7.877,-1.858) 76(7.877,-1.458) 77(7.877,-1.058) 78(7.877,-0.658) 79(7.877,-0.258) 80(7.877,0.142) 81(7.877,0.542) 82(7.877,0.942) 83(7.877,1.342) 84(7.877,1.742) 85(7.877,2.142) 86(7.877,2.542) 87(7.877,2.942) 88(7.877,3.342) 89(7.877,3.742) 90(7.877,4.142) 91(7.877,4.542) 92(7.877,4.942) 93(7.877,5.342) 94(7.877,5.742) 95(7.877,6.142) 96(7.877,6.542)
  rrect50% 0.22x1.4 smd paste+0 mask+0: 33(-6,-7.335) 34(-5.6,-7.335) 35(-5.2,-7.335) 36(-4.8,-7.335) 37(-4.4,-7.335) 38(-4,-7.335) 39(-3.6,-7.335) 40(-3.2,-7.335) 41(-2.8,-7.335) 42(-2.4,-7.335) 43(-2,-7.335) 44(-1.6,-7.335) 45(-1.2,-7.335) 46(-0.8,-7.335) 47(-0.4,-7.335) 48(0,-7.335) 49(0.4,-7.335) 50(0.8,-7.335) 51(1.2,-7.335) 52(1.6,-7.335) 53(2,-7.335) 54(2.4,-7.335) 55(2.8,-7.335) 56(3.2,-7.335) 57(3.6,-7.335) 58(4,-7.335) 59(4.4,-7.335) 60(4.8,-7.335) 61(5.2,-7.335) 62(5.6,-7.335) 63(6,-7.335) 64(6.4,-7.335) 97(6.4,8.019) 98(6,8.019) 99(5.6,8.019) 100(5.2,8.019) 101(4.8,8.019) 102(4.4,8.019) 103(4,8.019) 104(3.6,8.019) 105(3.2,8.019) 106(2.8,8.019) 107(2.4,8.019) 108(2,8.019) 109(1.6,8.019) 110(1.2,8.019) 111(0.8,8.019) 112(0.4,8.019) 113(0,8.019) 114(-0.4,8.019) 115(-0.8,8.019) 116(-1.2,8.019) 117(-1.6,8.019) 118(-2,8.019) 119(-2.4,8.019) 120(-2.8,8.019) 121(-3.2,8.019) 122(-3.6,8.019) 123(-4,8.019) 124(-4.4,8.019) 125(-4.8,8.019) 126(-5.2,8.019) 127(-5.6,8.019) 128(-6,8.019)
  silkscreen extent -7.42,-6.78 7.32,7.97, body extent -7.8,-7.66 8.2,8.34, height 1.6
PKG_LQFP-128 [mm]
  rect 1.475x0.2 smd: 1(-7.738,6.2) 2(-7.738,5.8) 3(-7.738,5.4) 4(-7.738,5) 5(-7.738,4.6) 6(-7.738,4.2) 7(-7.738,3.8) 8(-7.738,3.4) 9(-7.738,3) 10(-7.738,2.6) 11(-7.738,2.2) 12(-7.738,1.8) 13(-7.738,1.4) 14(-7.738,1) 15(-7.738,0.6) 16(-7.738,0.2) 17(-7.738,-0.2) 18(-7.738,-0.6) 19(-7.738,-1) 20(-7.738,-1.4) 21(-7.738,-1.8) 22(-7.738,-2.2) 23(-7.738,-2.6) 24(-7.738,-3) 25(-7.738,-3.4) 26(-7.738,-3.8) 27(-7.738,-4.2) 28(-7.738,-4.6) 29(-7.738,-5) 30(-7.738,-5.4) 31(-7.738,-5.8) 32(-7.738,-6.2) 65(7.738,-6.2) 66(7.738,-5.8) 67(7.738,-5.4) 68(7.738,-5) 69(7.738,-4.6) 70(7.738,-4.2) 71(7.738,-3.8) 72(7.738,-3.4) 73(7.738,-3) 74(7.738,-2.6) 75(7.738,-2.2) 76(7.738,-1.8) 77(7.738,-1.4) 78(7.738,-1) 79(7.738,-0.6) 80(7.738,-0.2) 81(7.738,0.2) 82(7.738,0.6) 83(7.738,1) 84(7.738,1.4) 85(7.738,1.8) 86(7.738,2.2) 87(7.738,2.6) 88(7.738,3) 89(7.738,3.4) 90(7.738,3.8) 91(7.738,4.2) 92(7.738,4.6) 93(7.738,5) 94(7.738,5.4) 95(7.738,5.8) 96(7.738,6.2)
  rect 0.2x1.475 smd: 33(-6.2,-7.738) 34(-5.8,-7.738) 35(-5.4,-7.738) 36(-5,-7.738) 37(-4.6,-7.738) 38(-4.2,-7.738) 39(-3.8,-7.738) 40(-3.4,-7.738) 41(-3,-7.738) 42(-2.6,-7.738) 43(-2.2,-7.738) 44(-1.8,-7.738) 45(-1.4,-7.738) 46(-1,-7.738) 47(-0.6,-7.738) 48(-0.2,-7.738) 49(0.2,-7.738) 50(0.6,-7.738) 51(1,-7.738) 52(1.4,-7.738) 53(1.8,-7.738) 54(2.2,-7.738) 55(2.6,-7.738) 56(3,-7.738) 57(3.4,-7.738) 58(3.8,-7.738) 59(4.2,-7.738) 60(4.6,-7.738) 61(5,-7.738) 62(5.4,-7.738) 63(5.8,-7.738) 64(6.2,-7.738) 97(6.2,7.738) 98(5.8,7.738) 99(5.4,7.738) 100(5,7.738) 101(4.6,7.738) 102(4.2,7.738) 103(3.8,7.738) 104(3.4,7.738) 105(3,7.738) 106(2.6,7.738) 107(2.2,7.738) 108(1.8,7.738) 109(1.4,7.738) 110(1,7.738) 111(0.6,7.738) 112(0.2,7.738) 113(-0.2,7.738) 114(-0.6,7.738) 115(-1,7.738) 116(-1.4,7.738) 117(-1.8,7.738) 118(-2.2,7.738) 119(-2.6,7.738) 120(-3,7.738) 121(-3.4,7.738) 122(-3.8,7.738) 123(-4.2,7.738) 124(-4.6,7.738) 125(-5,7.738) 126(-5.4,7.738) 127(-5.8,7.738) 128(-6.2,7.738)
  silkscreen extent -8.37,-6.65 6.65,6.9, body extent -8,-8 8,8, height 1.6
"PKG_SMA (DO-214AC)" [mm] "Molded Diode, 2-Leads, Body 4.25x2.67mm, IPC Medium Density"
  rect 2.4x1.55 smd: 1(-1.525,0) 2(1.525,0)
  silkscreen extent -3.02,-1.4 2.25,1.45, body extent -2.47,-1.4 2.47,1.4, height 2.29
PKG_SOD-323 [mm] "SOIC, 2-Leads, Body 1.25x1.70mm, Pitch 1.27mm, IPC Medium Density"
  oval 0.8x0.5 smd: 1(-1.3,0) 2(1.3,0)
  silkscreen extent -1.42,-0.7 0.5,0.92, body extent -1.37,-0.7 1.37,0.7, height 1
PKG_SOT-23 [mm]
  rect 1x1.4 smd paste+0 mask+0.102: 1(-0.95,-1.1) 2(0.95,-1.1) 3(0,1.1)
  silkscreen extent -1.45,0.74 1.45,1.42, body extent -1.45,-1.4 1.45,1.4, height 1.25
PKG_SOT-89-5 [mm]
  rect 0.7x1.5 smd: 1(-1.5,-1.85) 3(1.5,-1.85) 4(1.5,1.85) 5(-1.5,1.85)
  rect 1x5.2 smd: 2(0,0)
  SIG region: 1,0.4 1,-0.4 0,-1.4 -1,-0.4 -1,0.4 0,1.4
  body extent -2.25,-2.22 2.25,2.22, height 1.6
PKG_SOT-223 [mm]
  rect 2.15x0.95 smd: 1(-2.9,2.3) 2(-2.9,0) 3(-2.9,-2.3)
  rect 2.15x3.25 smd: 4(2.9,0)
  silkscreen extent -4.7,-3.25 1.75,3.25, body extent -3.5,-3.25 3.5,3.25, height 1.8
PKG_TSX-3225 [mm]
  rect 1.2x1.4 smd: 1(-0.781,1.115) 2(-0.781,-1.085) 3(0.819,-1.085) 4(0.819,1.115)
  silkscreen extent -2.14,1.16 -1.89,1.41, body extent -1.23,-1.58 1.27,1.62, height 0.9
R_0805 [mil]
  rect 35.98x54.41 smd: 1(-36,0) 2(35,0)
  body extent -41,-27 41,27, height 24
SW_SMD_NOGND [mil]
  rect 50x60 smd paste+0 mask+0: 1(-88,0) 2(88,0)
  silkscreen extent -100,-60 100,60, body extent -96,-57 96,57, height 79

## Part data
C1 C2 C3 C4 C5 C6 C7 C9 C10 C11 C12 C13 C14 C15 C16 C17 C18 C19 C20 C21 C22 C23 C24 C25 C26 C27 C28 C29 C30 C31 C32 C33 C34 C35 C36 C37 C38 C39 C40 C41 C42 C43 C44 C45 C46 C47 C48 C49 C50 C51 C52 C53 C54 C55 C56 C57 C58 C59 C60 C61 C62 C63 C64 C65 C66 C67 C68 C69 C70 C71 C72 C78 C79 C80 C81 C82 C83 C84 C85 C86 C87 C88 C91 C92 C93 C94 C95 C96 C97 C98 C99 C100 C101 C102 C103 C104 C105 C106: library part CAP_0805, "CAP_0805", Manufacturer 1=Vishay, Manufacturer Part Number 1=CAP0805, Package=0805, Datasheet=https://www.mouser.de/datasheet/2/447/PYu_RC_Group_51_RoHS_L_11-1984063.pdf, Supplier 1=Thegioiic, Supplier Link=N/a
C8: library part CAP+2917, "CAP+2917", Manufacturer 1=OEM, Manufacturer Part Number 1=N/a, Package=2917, Datasheet=N/a, Supplier 1=Thegioiic, Supplier Link=N/a
C73 C74 C75 C76 C77 C89 C90: library part CAP_1206, "CAP_1206", Manufacturer 1=Vishay, Manufacturer Part Number 1=CAP0805, Package=1206, Datasheet=https://www.mouser.de/datasheet/2/447/PYu_RC_Group_51_RoHS_L_11-1984063.pdf, Supplier 1=Thegioiic, Supplier Link=N/a
C107: library part CAP+1206, "CAP+1206", Manufacturer 1=OEM, Manufacturer Part Number 1=N/a, Package=1206, Datasheet=N/a, Supplier 1=Thegioiic, Supplier Link=N/a
D1 D4 D5 D6 D7 D8 D9: library part SCHOTTKY, "SS34", Manufacturer 1=OEM, Manufacturer Part Number 1=N/a, Package=DO-214AC, ComponentLink1Description=Datasheet, ComponentLink1URL=https://www.vishay.com/doc?89055, Datasheet=N/a, Supplier 1=Thegioiic, Supplier Link=N/a
D2: library part GREEN, "Green LED", Manufacturer 1=LITE-ON, Manufacturer Part Number 1=LEDG, Package=1206, ComponentLink1Description="Datasheet link", ComponentLink1URL=N/A, ComponentLink2Description="Supplier 1 URL", ComponentLink2URL=https://www.mouser.vn/ProductDetail/Broadcom-Avago/HSMG-C170?qs=YDL0qNrpDT4lm8ArMPkMEA%3D%3D, ComponentLink3Description="Supplier 2 URL", ComponentLink3URL="SML-LXT0805GW-TR Lumex Opto/Components Inc. | Optoelectronics | DigiKey", ComponentLink4Description="Supplier 3 URL", ComponentLink4URL=N/A, Datasheet=https://www.mouser.com/datasheet/2/239/LTST-S326KGKFKT-1143909.pdf?srsltid=AfmBOorgg6Gh4PD3T9FRO6Da906Aqdqx3RSjbUQRSIXh-3hATfgAoF8Q, Supplier 1=ICDAYROI, Supplier Link=https://icdayroi.com/led-smd-0805
D3: library part DIODE, "1N4148W", Manufacturer 1=OEM, Manufacturer Part Number 1=N/a, Package=SOD-323, ComponentLink1Description=Datasheet, ComponentLink1URL=https://www.mouser.vn/datasheet/2/345/fm4001_fm4007-1113844.pdf, Datasheet=N/a, Supplier 1=Thegioiic, Supplier Link=N/a
D10: library part RED, "Red LED", Manufacturer 1=LITE-ON, Manufacturer Part Number 1=LEDR, Package=1206, ComponentLink1Description="Datasheet link", ComponentLink1URL=N/A, ComponentLink2Description="Supplier 1 URL", ComponentLink2URL=https://www.mouser.vn/ProductDetail/ROHM-Semiconductor/SML-H12U8TT86C?qs=HXFqYaX1Q2xs%2F%252BL6XLQEvw%3D%3D, ComponentLink3Description="Supplier 2 URL", ComponentLink3URL=https://www.digikey.com/en/products/detail/liteon/LTST-C171KRKT/386801, ComponentLink4Description="Supplier 3 URL", ComponentLink4URL=https://www.thegioiic.com/led-do-0805-dan-smd-trong-suot-harvatek, Datasheet=https://www.mouser.com/datasheet/2/239/LTST-S326KGKFKT-1143909.pdf?srsltid=AfmBOorgg6Gh4PD3T9FRO6Da906Aqdqx3RSjbUQRSIXh-3hATfgAoF8Q, Supplier 1=ICDAYROI, Supplier Link=https://icdayroi.com/led-smd-0805
J1: "Jack DC", Manufacturer 1=OEM, Datasheet=N/a, Manufacturer Part Number 1=DC5521, Supplier 1=Thegioiic, Supplier Link=https://www.thegioiic.com/dc5521-dau-noi-nguon-dc-cai-5521-han-pcb-kim-2-1mm
L1: library part IN_0630, "IN_0630", Manufacturer 1=OEM, Manufacturer Part Number 1=N/a, Package=0630, ComponentLink1Description=Datasheet, ComponentLink1URL=https://product.tdk.com/system/files/dam/doc/product/inductor/inductor/smd/catalog/inductor_automotive_decoupling_mlz1608_en.pdf?ref_disty=mouser, ComponentLink2Description="Supplier 1 URL", ComponentLink2URL=https://www.mouser.vn/ProductDetail/TDK/MLZ1608M100WTD25?qs=u4%252BEJ9urDATpNhOvJ54DAQ%3D%3D, ComponentLink3Description="Supplier 2 URL", ComponentLink3URL=https://www.digikey.com/en/products/detail/tdk-corporation/MLZ1608M100WTD25/4743176, ComponentLink4Description="Supplier 3 URL", Datasheet=N/a, Supplier 1=Thegioiic, Supplier Link=N/a
L2: library part IN_CD32, "IN_CD32", Manufacturer 1=OEM, Manufacturer Part Number 1=N/a, Package=CD32, ComponentLink1Description=Datasheet, ComponentLink1URL=https://product.tdk.com/system/files/dam/doc/product/inductor/inductor/smd/catalog/inductor_automotive_decoupling_mlz1608_en.pdf?ref_disty=mouser, ComponentLink2Description="Supplier 1 URL", ComponentLink2URL=https://www.mouser.vn/ProductDetail/TDK/MLZ1608DR10DTD25?qs=u4%252BEJ9urDARQOELDKhLR2A%3D%3D, ComponentLink3Description="Supplier 2 URL", ComponentLink3URL=https://www.digikey.com/en/products/detail/tdk-corporation/MLZ1608DR10DTD25/4743170, ComponentLink4Description="Supplier 3 URL", Datasheet=N/a, Supplier 1=Thegioiic, Supplier Link=N/a
LCD1: "LCD 7 inch (800 x 3(RGB) x 480) RES / __NOTE THAT THIS IS FFC 50PINS CONN w/ THE LCD FOOTPRINT!__", Connector Part Number="0541325097 (Molex)", Manufacturer 1="INNOLUXDISPLAY Corp.", Manufacturer Part Number 1=AT070TN92, Datasheet=https://mm.digikey.com/Volume0/opasdata/d220001/medias/docus/530/AT070TN92_Jan12_2009_spec.pdf, Supplier 1="Thegioiic (Out of stock)", Supplier Link=https://www.thegioiic.com/lcd-7inch-rbg-800x480-at070tn92-tft-rgb-innolux
LCD2: library part "GT911 Cap Touch Screen", "7 ”Capacitive Touch Panel", Manufacturer 1="Ronbo Electronics Limited", Manufacturer Part Number 1=N/a, Datasheet=https://www.fortec-integrated.de/fileadmin/pdf/produkte/Touchcontroller/DDGroup/GT911_Datasheet.pdf, Supplier 1=Made-in-China, Supplier Link=https://vi.made-in-china.com/co_ronboelectronics/product_7-0-Inch-Big-Size-Cover-Tempered-Glass-Projected-Capacitive-Touch-Panel-Multi-Touch-Screen_rgireihug.html?pv_id=1js43nnncc14&faw_id=1js43nokudbb&bv_id=1js43oog8196&pbv_id=1js43npif719z
P1: "Header, 2-Pin", LatestRevisionDate=17-Jul-2002, LatestRevisionNote="Re-released for DXP Platform.", Publisher="Altium Limited"
P2: library part HEADER5, "Header 5 pins (2.54mm)", Manufacturer 1=OEM, Manufacturer Part Number 1="XH2.54mm 5", Datasheet=N/a, Supplier 1=Thegioiic, Supplier Link=https://www.thegioiic.com/dau-xh2-54mm-5-chan-dan-smd-nam-ngang
P3: "Header, 4-Pin", LatestRevisionDate=17-Jul-2002, LatestRevisionNote="Re-released for DXP Platform.", Publisher="Altium Limited"
P4: "Header, 6-Pin", LatestRevisionDate=17-Jul-2002, LatestRevisionNote="Re-released for DXP Platform.", Publisher="Altium Limited"
P5: library part HEADER10, "NOTE: FOOTPRINT IS 2.54mm MEANWHILE 3D IS 2.5mm.", Manufacturer 1=OEM, Manufacturer Part Number 1="XH2.54mm 10", Datasheet=N/a, Supplier 1=Thegioiic, Supplier Link=https://www.thegioiic.com/dau-xh2-54mm-10-chan-thang-xuyen-lo
P6: library part HEADER4, "Header 4 pins (2.54mm)", Manufacturer 1=OEM, Manufacturer Part Number 1="XH2.54mm 4", Datasheet 1=N/a, Supplier 1=Thegioiic, Supplier Link=https://www.thegioiic.com/dau-xh2-54mm-4-chan-dan-smd-nam-ngang
Q1 Q2 Q3 Q4 Q5: "P-Channel 30 V 4A (Ta) 1.4W (Ta) Surface Mount SOT-23-3", Manufacturer 1="Alpha&Omega Semi.", Package=SOT-23, Datasheet=https://www.snapeda.com/parts/AO3401/Alpha%20&%20Omega%20Semiconductor/datasheet/, Manufacturer Part Number 1=AO3401, Supplier 1=ICDayroi, Supplier Link=https://icdayroi.com/ao3401
R1 R2 R3 R4 R5 R6 R7 R8 R9 R10 R11 R12 R13 R14 R15 R16 R17 R18 R19 R20 R21 R22 R23 R24 R25 R26 R27 R28 R29 R30 R31 R32 R33 R34 R35 R36 R37 R38 R39 R40 R41 R42 R43 R44 R45 R46 R47 R48 R49 R50 R51 R52: library part RES_0805, "RES_0805", Manufacturer 1=Vishay, Manufacturer Part Number 1=RES0805, Package=0805, Datasheet=https://www.mouser.de/datasheet/2/447/PYu_RC_Group_51_RoHS_L_11-1984063.pdf, Supplier 1=Thegioiic, Supplier Link=N/a
  R1 R2 R3 R4 R5 R6 R7 R8 R9 R10 R11 R12 R13 R14 R15 R16 R17 R18 R19 R21 R23 R24 R25 R26 R27 R28 R29 R30 R31 R33 R34 R36 R37 R38 R41 R42 R43 R44 R45 R46 R47 R48 R49 R50 R51 R52: Acc=5%
  R32 R35 R39 R40: Acc=1%
SD1: "MICRO SD MEMORY CARD SOCKET", Manufacturer 1=OEM, Manufacturer Part Number 1=MiSD-PP-9P-V1, Package=MicroSD, Datasheet=N/a, Supplier 1=Thegioiic, Supplier Link=https://www.thegioiic.com/misd-pp-9p-v1-khay-the-nho-microsd-9-chan-push-push
SW1 SW2 SW3 SW4 SW5 SW6: library part SWSMD_NOGND, "SW_SMD", Manufacturer 1=OEM, Manufacturer Part Number 1=N/a, Datasheet=N/a, Supplier 1=Thegioiic, Supplier Link=https://www.thegioiic.com/nut-nhan-3x6mm-cao-3-5mm-4-chan-smd-chinh-ngang
U1: "600KHz, 16V，2A Synchronous / Step-Down Converter", Manufacturer 1=AEROSEMI, Package=SOT23-6, Datasheet=https://images.tuyacn.com/smart/A_TUYA/camera/MT2492.pdf, Manufacturer Part Number 1=MT2492, Supplier 1=linhkienthuduc, Supplier Link=https://linhkienthuduc.com/san-pham/mt2492-ic-nguon-buck-2a/?srsltid=AfmBOoqjhnkSrAs4LOHLVGH4jS9BsyeN6OqcnkH62NuZAXu-ngXV-6yD
U2: "800mA Low-Dropout Linear Regulator", Manufacturer 1=TI, Package=SOT-223, Datasheet=https://www.ti.com/lit/ds/symlink/lm1117.pdf, Manufacturer Part Number 1=LM1117-3.3V, Supplier 1=Thegioiic, Supplier Link=https://www.thegioiic.com/lm1117imp-3-3-nopb-cn-ic-on-ap-3-3v-800ma-sot-223
U3: "0V, 1.2A Step-down High Brightness / LED Driver with 5000:1 Dimming", Manufacturer 1=PowTech, Datasheet=https://www.microelectronicash.com/downloads/PT4115.pdf, Manufacturer Part Number 1=PT4115, Supplier 1=icdayroi, Supplier Link=https://icdayroi.com/pt4115-pt4115b89e-sot-89-5
U4: "1A Adjustable/Fixed Low Dropout Linear Regulator", Manufacturer 1=AMS, Package=SOT-223, Datasheet=http://www.ams-semitech.com/attachments/File/AMS1117_20120314.pdf, Manufacturer Part Number 1=AMS1117-1.2V, Supplier 1=Thegioiic, Supplier Link=https://www.thegioiic.com/ams1117-1-2v-ic-on-ap-1-2v-1a-sot-223
U5: "Arm® Cortex®-M4 32b MCU+FPU, 210DMIPS, up to 1MB flash/192+4KB RAM, USB / OTG HS/FS, Ethernet, 17 TIMs, 3 ADCs, 15 comm. interfaces, and camera", Manufacturer 1=STMicroelectronics, Package=LQFP-100, Datasheet=https://www.st.com/content/ccc/resource/technical/document/datasheet/ef/92/76/6d/bb/c2/4f/f7/DM00037051.pdf/files/DM00037051.pdf/jcr:content/translations/en.DM00037051.pdf, Manufacturer Part Number 1=STMF407VET6, Supplier 1=Thegioiic, Supplier Link=https://www.thegioiic.com/stm32f407vet6-32-bit-arm-cortex-m4-microcontroller-168mhz-512kb-flash-100-lqfp
U6: "1215KB Embedded Display SRAM / LCD Display Controller", Manufacturer 1="SOLOMON SYSTECH", Package=LQFP-128, Datasheet=https://static6.arrow.com/aropdfconversion/7fb71007d6edcf4fd7d2515afdb6bb091bd21e01/ssd1963ql9.pdf, Manufacturer Part Number 1="SOLOMON SYSTECH", Supplier 1=TechPal, Supplier Link=https://linhkien.techpal.vn/san-pham/ssd1963ql9/
U7: "BIAS POWER SUPPLY FOR TV AND MONITOR TFT LCD PANELS", Manufacturer 1=TI, Datasheet=https://www.ti.com/lit/ds/symlink/tps65161.pdf?ts=1780769383696&ref_url=https%253A%252F%252Fwww.google.com%252F, Manufacturer Part Number 1=TPS65161, Supplier 1=shoppee, Supplier Link=https://shopee.vn/5-C%C3%81I-TPS65161PWPR-TSSOP28-TPS65161-TSSOP-28-TPS65161PW-TSSOP-TPS65161PWP-linh-ki%E1%BB%87n-%C4%91i%E1%BB%87n-t%E1%BB%AD-vanxy-i.1274879032.50207449630
U8: "Electrostatic Discharge Protection Device", Manufacturer 1=Littelfuse, Datasheet=https://www.littelfuse.com/assetdocs/littelfuse-tvs-diode-array-srv05-4htg-d-datasheet?assetguid=d716fc4c-0484-4b67-97d8-cf719554d89a, Manufacturer Part Number 1=SRV05-4HTG, Pkg=SOT23-6, Supplier 1=digikey, Supplier Link=https://www.digikey.com/en/products/detail/littelfuse-inc/SRV05-4HTG/3130460
USB1: library part USB_C, "USB Type C Receptacle for USB2.0, SMT Type, PCB Top Mount", Manufacturer 1=GCT, Datasheet=https://gct.co/files/specs/usb4105-spec.pdf, Manufacturer Part Number 1=USB4105-GF-A, Supplier 1=Thegioiic, Supplier Link=https://www.thegioiic.com/cong-usb-cai-3-1-type-c-16-chan-thang-dan-smd, Supplier Link 2=https://www.digikey.com/en/products/detail/gct/USB4105-GF-A/11198510
X1: library part XTAL, "Crystal, 25 MHz, -30 to 85 degC, 3.2 x 2.5 x 0.9 mm SMD", Manufacturer 1=EPSON, Manufacturer Part Number 1="TSX-3225 25.0000MF20P-C0", Package=TSX-3225, Datasheet=https://www.epsondevice.com/crystal/en/, Supplier 1=Thegioiic, Supplier Link=https://www.thegioiic.com/thach-anh-25mhz-3225-4-chan-smd
X2: library part XTAL_8MHZ, "Crystal, 10 MHz, -30 to 85 degC, 3.2 x 2.5 x 0.9 mm SMD", Manufacturer 1=OEM, Manufacturer Part Number 1="SMD HC49-S 10MHz", Datasheet=N/a, Supplier 1=Thegioiic, Supplier Link=https://www.thegioiic.com/thach-anh-10mhz-2-chan-smd-hc49-s

## Nets (pads, with @x,y where several pads share a name; then routed paths per layer and width w, separated by ;. In a path a pad name is that pad's centre, name@x,y a point inside that pad or via, vN(x,y) a via of type N, cw(c..) or ccw(c..) an arc to the next point about the centre after c; other vN are vias at no path point)
1.2V: C11.2 C12.2 C39.2 C40.2 C41.2 C42.2 C43.2 C44.2 C45.2 C46.2 C47.2 C48.2 C49.2 C50.2 C51.2 C52.2 C53.2 C54.2 C55.2 C66.2 R30.2 U4.2 U4.4 U6.1 U6.6 U6.14 U6.21 U6.25 U6.32 U6.40 U6.46 U6.56 U6.64 U6.73 U6.82 U6.93 U6.102 U6.110 U6.119 U6.126
3V3: C6.2 C7.2 C9.2 C10.2 C13.2 C14.2 C15.2 C16.2 C17.2 C18.2 C19.2 C30.2 C31.2 C32.2 C33.2 C34.2 C35.2 C36.2 C37.2 C38.2 C56.2 C57.2 C58.2 C59.2 C60.2 C61.2 C62.2 C63.2 C64.2 C65.2 C67.2 C89.2 C90.2 C94.1 C98.2 C99.2 C100.2 C101.2 C102.2 C104.2 C105.2 C107.2 LCD1.6 LCD1.7 LCD1.8 LCD1.39 LCD1.46 LCD1.47 LCD2.6 P2.1 P3.1 P5.1 R8.2 R9.2 R11.2 R12.2 R15.1 R19.2 R25.1 R26.1 R27.1 R28.1 R39.2 R41.2 R42.1 R47.2 R48.2 R49.2 R50.2 R51.2 R52.1 SD1.4 SW2.1 U2.2 U2.4 U4.3 U5.6 U5.11 U5.28 U5.50 U5.75 U5.100 U6.4 U6.12 U6.16 U6.27 U6.34 U6.42 U6.48 U6.54 U6.58 U6.66 U6.75 U6.84 U6.95 U6.97 U6.100 U6.108 U6.117 U6.124 U6.128
5V: C2.1 C4.2 C5.2 L1.2 P4.1 P6.1 Q5.2 R3.2 R21.2 U2.3 U8.5
9V: J1.1 Q1.3 R1.2
10.4V: C75.2 C76.2 C77.2 C95.2 D5.2 LCD1.43 Q4.3
16V: C84.1 C96.2 D7.1 LCD1.41 R35.2
-7V: C85.1 C97.2 D6.2 LCD1.42 R36.2
B0: LCD1.19 U6.81
B1: LCD1.18 U6.80
B2: LCD1.17 U6.79
B3: LCD1.16 U6.78
B4: LCD1.15 U6.77
B5: LCD1.14 U6.76
B6: LCD1.13 U6.72
B7: LCD1.12 U6.71
BT0: R14.1 U5.94
FSMC_A18: U5.60 U6.122
FSMC_D0: U5.61 U6.7
FSMC_D1: U5.62 U6.8
FSMC_D2: U5.81 U6.9
FSMC_D3: U5.82 U6.10
FSMC_D4: U5.38 U6.11
FSMC_D5: U5.39 U6.116
FSMC_D6: U5.40 U6.115
FSMC_D7: U5.41 U6.114
FSMC_D8: U5.42 U6.113
FSMC_D9: U5.43 U6.112
FSMC_D10: U5.44 U6.111
FSMC_D11: U5.45 U6.107
FSMC_D12: U5.46 U6.106
FSMC_D13: U5.55 U6.105
FSMC_D14: U5.56 U6.104
FSMC_D15: U5.57 U6.103
FSMC_NE1: U5.88 U6.123
FSMC_NOE: U5.85 U6.120
FSMC_NWE: U5.86 U6.121
G0: LCD1.27 U6.70
G1: LCD1.26 U6.69
G2: LCD1.25 U6.68
G3: LCD1.24 U6.67
G4: LCD1.23 U6.63
G5: LCD1.22 U6.62
G6: LCD1.21 U6.61
G7: LCD1.20 U6.60
GND: C2.2 C4.1 C5.1 C6.1 C7.1 C8.1 C9.1 C10.1 C11.1 C12.1 C13.1 C14.1 C15.1 C16.1 C17.1 C18.1 C19.1 C20.2 C21.2 C22.1 C23.1 C24.1 C27.1 C28.2 C29.2 C30.1 C31.1 C32.1 C33.1 C34.1 C35.1 C36.1 C37.1 C38.1 C39.1 C40.1 C41.1 C42.1 C43.1 C44.1 C45.1 C46.1 C47.1 C48.1 C49.1 C50.1 C51.1 C52.1 C53.1 C54.1 C55.1 C56.1 C57.1 C58.1 C59.1 C60.1 C61.1 C62.1 C63.1 C64.1 C65.1 C66.1 C67.1 C68.1 C69.1 C70.1 C73.1 C74.1 C75.1 C76.1 C77.1 C79.1 C80.1 C81.2 C84.2 C85.2 C87.2 C88.2 C89.1 C90.1 C91.2 C92.2 C93.2 C95.1 C96.1 C97.1 C98.1 C99.1 C100.1 C101.1 C102.1 C104.1 C105.1 C106.1 C107.1 D2.1 D8.1 D10.1 J1.2 LCD1.5 LCD1.36 LCD1.38 LCD1.40 LCD1.48 LCD1.51 LCD1.52 LCD2.1 LCD2.S1 LCD2.S2 P2.5 P2.6 P3.4 P4.6 P5.10 P6.4 P6.5 Q3.3 R4.1 R5.1 R6.1 R10.2 R17.2 R23.2 R24.2 R31.2 R34.1 R37.1 R40.1 R44.2 R45.2 R46.2 SD1.6 SD1.9 SW1.1 SW3.1 SW4.1 SW5.1 SW6.1 U1.2 U2.1 U3.2 U4.1 U5.10 U5.27 U5.74 U5.99 U6.2 U6.3 U6.5 U6.13 U6.17 U6.20 U6.23 U6.26 U6.33 U6.41 U6.47 U6.52 U6.53 U6.55 U6.57 U6.65 U6.74 U6.83 U6.94 U6.96 U6.101 U6.109 U6.118 U6.125 U7.6 U7.7 U7.23 U8.2 USB1.A1 USB1.B1 USB1.SHIELD X1.2 X1.4
GT911_RST: LCD2.5 R52.2 U5.97
I2C1_SCL: LCD2.3 P3.2 R8.1 U5.95
I2C1_SDA: LCD2.2 P3.3 R11.1 U5.96
IN0: C28.1 R26.2 SW3.2 U5.2
IN1: C29.1 R27.2 SW4.2 U5.3
INT: LCD2.4 R25.2 U5.98
LCD_PWM: U3.3 U6.51
LCD_RST: C106.2 LCD1.44 R42.2 SW6.2
LDEN: LCD1.9 U6.49
LFRAME: LCD1.10 U6.43
LLINE: LCD1.11 U6.44
LSHIFT: LCD1.37 U6.45
Net1_1: R14.2
NetC1_1: C1.1 U1.1
NetC1_2: C1.2 L1.1 U1.6
NetC3_2: C3.2 U1.4
NetC20_1: C20.1 U5.73
NetC21_1: C21.1 U5.49
NetC27_2: C27.2 D3.2 Q3.1 R23.1 SW2.2
NetC78_1: C78.1 C79.2 C81.1 D4.1 Q4.2 R32.2 R33.2 U7.3 U7.8
NetC78_2: C78.2 R32.1 R34.2 U7.1
NetC82_1: C82.1 U7.10
NetC82_2: C82.2 D5.1 D7.2
NetC83_1: C83.1 U7.11
NetC83_2: C83.2 D6.1 D8.2
NetC86_1: C86.1 U7.17
NetC86_2: C86.2 D9.1 U7.18
NetC87_1: C87.1 U7.26
NetC88_1: C88.1 U7.25
NetC91_1: C91.1 R38.2 U7.24
NetC92_1: C92.1 U7.2
NetC93_1: C93.1 U7.28
NetC94_2: C94.2 R39.1 R40.2 U7.15
NetD1_2: D1.2 L2.1 U3.1
NetD2_2: D2.2 R13.1
NetD4_2: D4.2 U7.4 U7.5
NetD10_2: D10.2 R41.1
NetJ1_3: J1.3 P1.1
NetQ1_1: Q1.1 R1.1 R5.2
NetQ2_1: Q2.1 R2.1 R6.2
NetQ3_2: Q3.2 R18.1
NetQ4_1: Q4.1 R33.1 U7.27
NetQ5_1: Q5.1 R43.2 R44.1
NetQ5_3: Q5.3 R43.1 USB1.A4 USB1.B4
NetR3_1: R3.1 R4.2 U1.3
NetR17_1: R17.1 U5.37
NetR35_1: R35.1 R37.2 U7.14
NetR36_1: R36.1 R38.1 U7.13
NetR45_1: R45.1 USB1.B5
NetR46_1: R46.1 USB1.A5
NetU5_77: U5.77 U7.16
PA0: D3.1 P5.2 R18.2 U5.23
PA1: P5.3 U5.24
PA2: P5.4 U5.25
PA3: P5.5 U5.26
PA4: P5.6 U5.29
PA5: P5.7 U5.30
PA6: P5.8 U5.31
PA7: P5.9 U5.32
R0: LCD1.35 U6.59
R1: LCD1.34 U6.35
R2: LCD1.33 U6.86
R3: LCD1.32 U6.85
R4: LCD1.31 U6.31
R5: LCD1.30 U6.30
R6: LCD1.29 U6.29
R7: LCD1.28 U6.28
SD_CK: SD1.5 U5.83
SD_CMD: R51.1 SD1.3 U5.80
SD_D0: R47.1 SD1.7 U5.65
SD_D1: R48.1 SD1.8 U5.66
SD_D2: R49.1 SD1.1 U5.78 | length 24.2
  SIG w0.254: SD1.1 218.079,164.249 218.302,164.026 218.302,150.049 224.993,143.358
SD_D3: R50.1 SD1.2 U5.79
SPI2_CS: P4.2 R21.1 U5.51
SPI2_MISO: P4.4 U5.53
SPI2_MOSI: P4.5 U5.54
SPI2_SCK: P4.3 U5.52
SSD_OSC_IN: C69.2 R29.1 U6.22 X2.1
SSD_OSC_OUT: C70.2 R29.2 U6.24 X2.2
SSD_RST: C68.2 R28.2 SW5.2 U6.127
STM_OSC_IN: C22.2 R16.1 U5.13 X1.1
STM_OSC_OUT: C24.2 R16.2 U5.12 X1.3
STM_RST: C23.2 R15.2 SW1.2 U5.14
SWCLK: P2.3 R10.1 U5.76
SWDIO: P2.2 R9.1 U5.72
SWO: P2.4 R12.1 U5.89
T_PEN: U5.34 U6.50
TEST: R13.2 U5.7
UART1_RX: P6.3 U5.69
UART1_TX: P6.2 U5.68
USB_N: U5.70 U8.1 U8.6 USB1.A7 USB1.B7
USB_P: U5.71 U8.3 U8.4 USB1.A6 USB1.B6
VBAT: P1.2 Q2.3 R2.2
VDDA: C25.2 C26.2 R19.1 R20.1 U5.19 U5.22
VDDPLL: C71.2 C72.2 R30.1 U6.18
VLED+: C103.2 LCD1.1 LCD1.2 R7.1 U3.4
VLED-: C103.1 L2.2 LCD1.3 LCD1.4
VREF+: R20.2 R22.2 U5.21
VREF-: C25.1 C26.1 R22.1 R24.1 U5.20
VSSPLL: C71.1 C72.1 R31.1 U6.19
Vsupply: C3.1 C8.2 C73.2 C74.2 C80.2 D1.1 Q1.2 Q2.2 R7.2 U1.5 U3.5 U7.9 U7.12 U7.20 U7.21 U7.22
pads on no net: 1.1 1.2 2.1 2.2 D9.2 LCD1.45 LCD1.49 LCD1.50 U5.1 U5.4 U5.5 U5.8 U5.9 U5.15 U5.16 U5.17 U5.18 U5.33 U5.35 U5.36 U5.47 U5.48 U5.58 U5.59 U5.63 U5.64 U5.67 U5.84 U5.87 U5.90 U5.91 U5.92 U5.93 U5.101 U5.102 U5.103 U5.104 U5.105 U5.106 U5.107 U5.108 U5.109 U5.110 U5.111 U5.112 U5.113 U5.114 U5.115 U5.116 U5.117 U5.118 U5.119 U5.120 U5.121 U5.122 U5.123 U5.124 U5.125 U5.126 U5.127 U5.128 U6.15 U6.36 U6.37 U6.38 U6.39 U6.87 U6.88 U6.89 U6.90 U6.91 U6.92 U6.98 U6.99 U7.19 USB1.A8 USB1.B8

## Polygon pours and split planes (outlines as drawn)
GND on GND_1 (split plane): 249.349,100.51 100.51,100.51 100.51,179.372 249.349,179.372
GND on GND_2 (split plane): 249.349,100.51 100.51,100.51 100.51,179.372 249.349,179.372

## Silkscreen, mask and mechanical layers (free items; w line width, h text height)
Mechanical 1:
  the board outline again, w0.254

## Text inside footprints (layer, text, board x,y; h text height)
C8: Top Overlay "+" at 397.972,242.017 h1 r270
C107: Top Overlay "+" at 312.594,50.401 h1 r270
D2: Top Overlay "+" at 572.541,296.113 h0.76 r90
D10: Top Overlay "+" at 363.672,222.327 h0.76 r180